# Altium PCB Audio_testboard.PcbDoc (part 1 of 6)
Units mm, origin at the board's own origin, x right, y up, seen from the top; angles counter-clockwise.
Board outline 220.73 x 144.32 mm, 4 copper layers (Top Layer, Mid-Layer 1, Mid-Layer 2, Bottom Layer), stack 1.894 mm thick; 462 components, 310 nets, 1757 pads, 740 vias.
Unrouted connection lines stored in the file: 5.
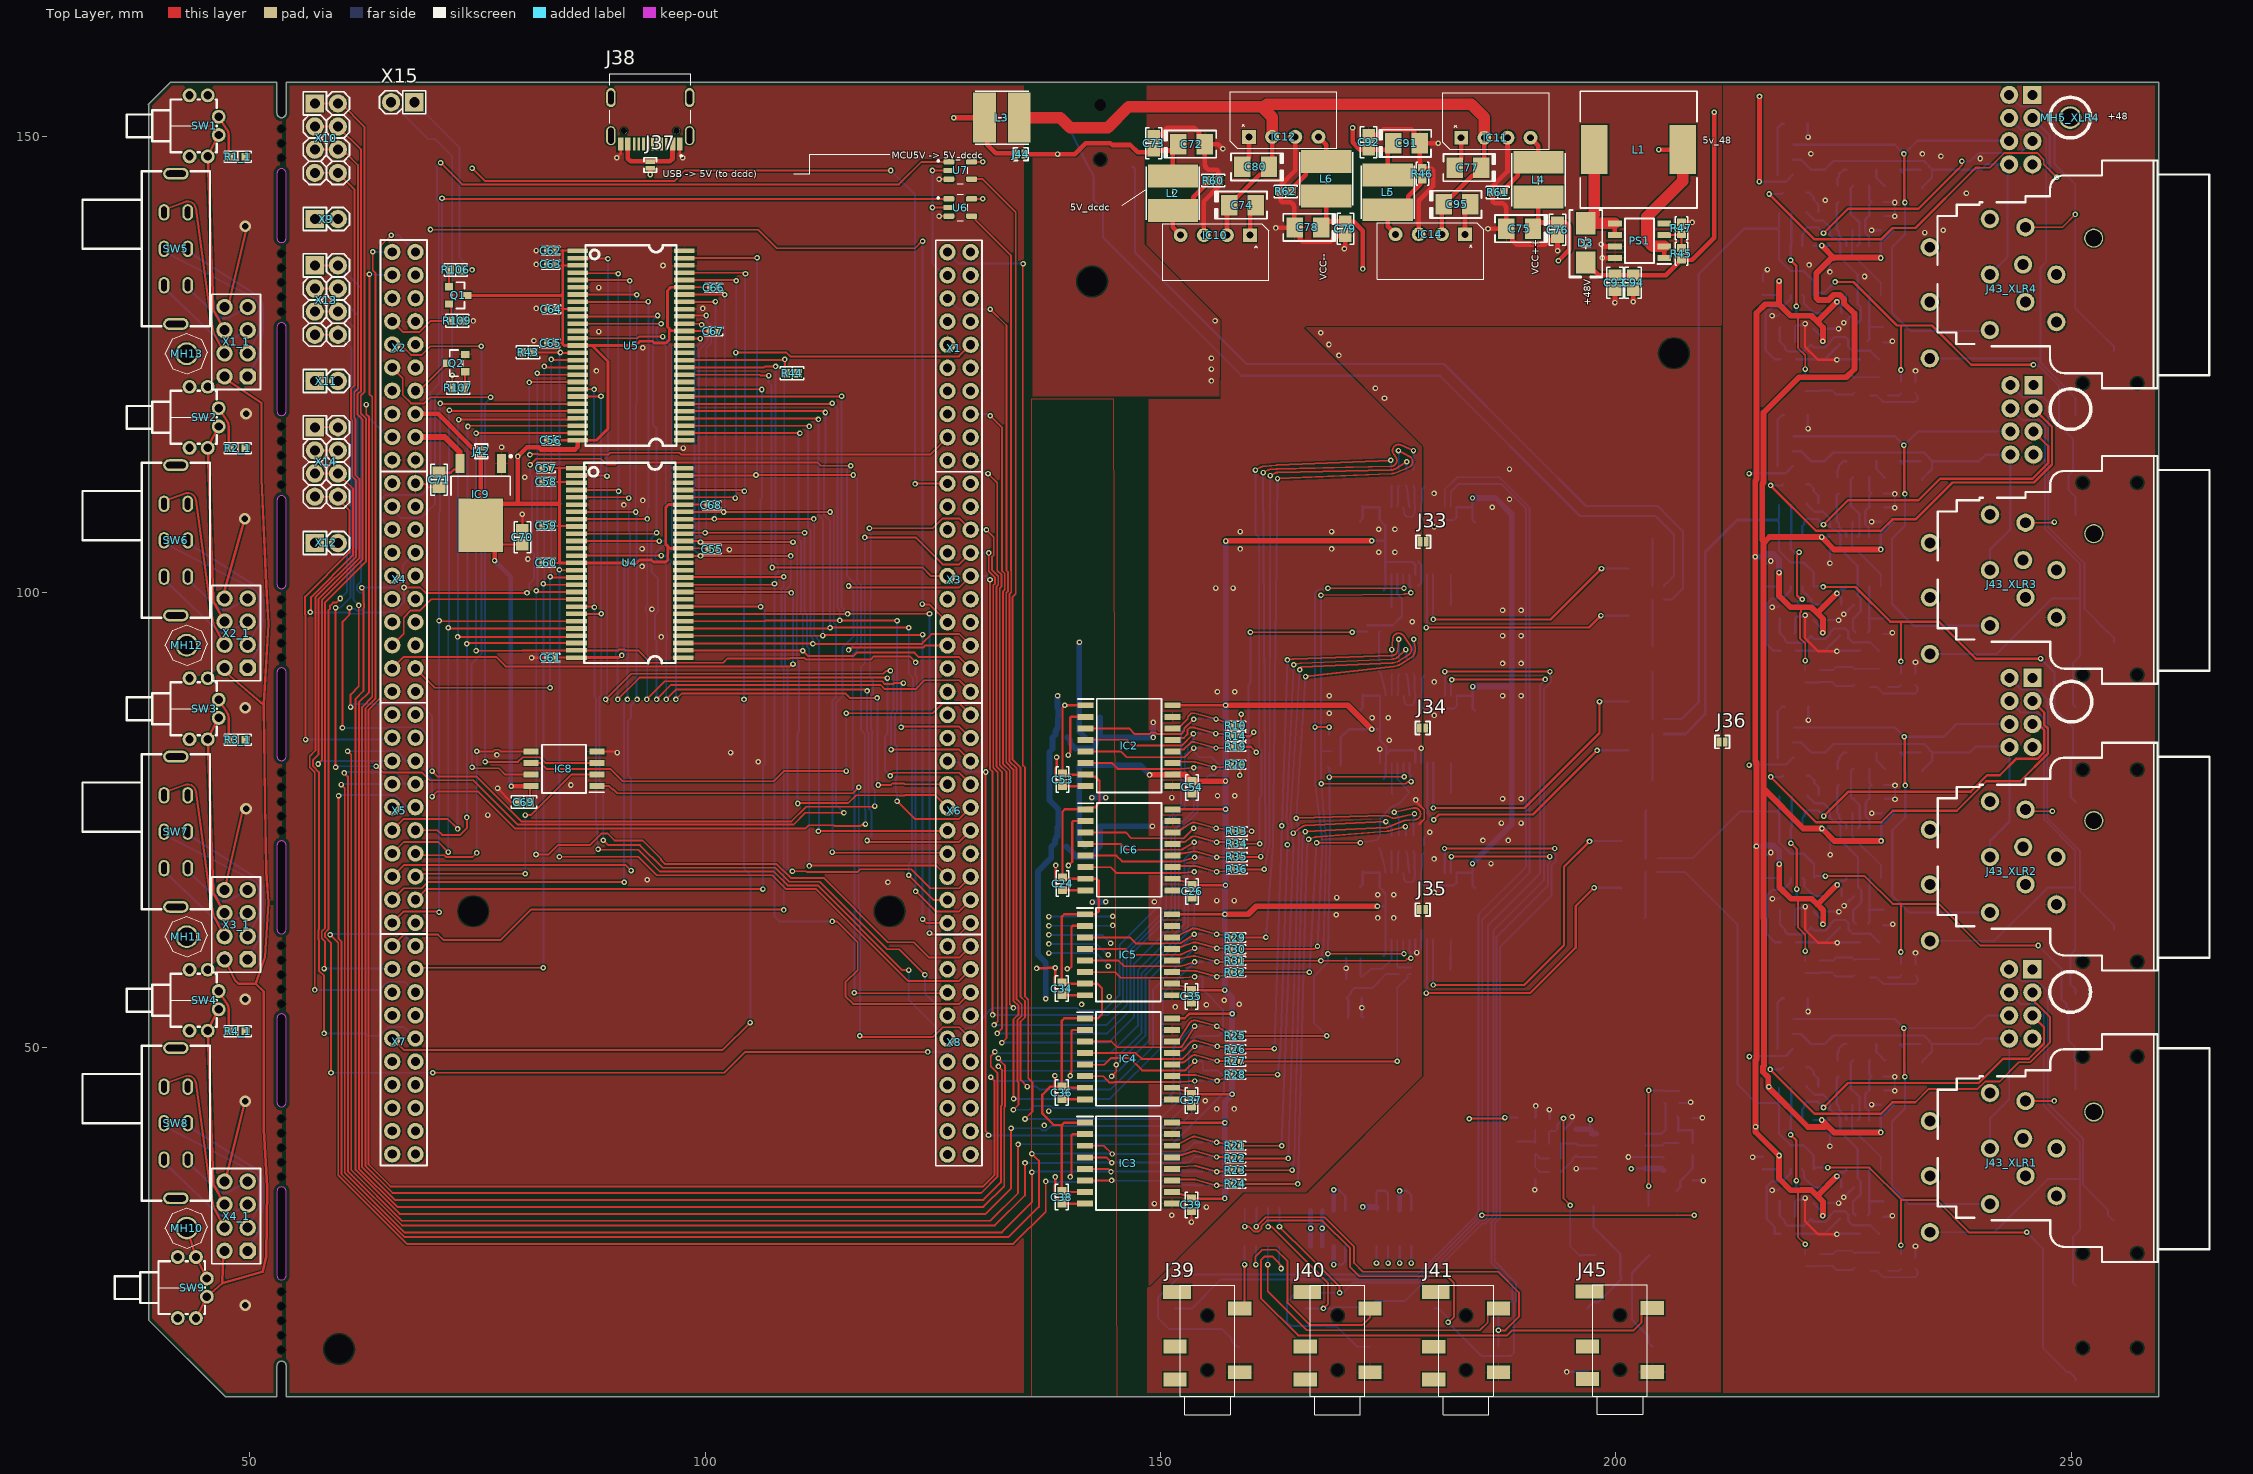
[diagram p0: Top Layer view]
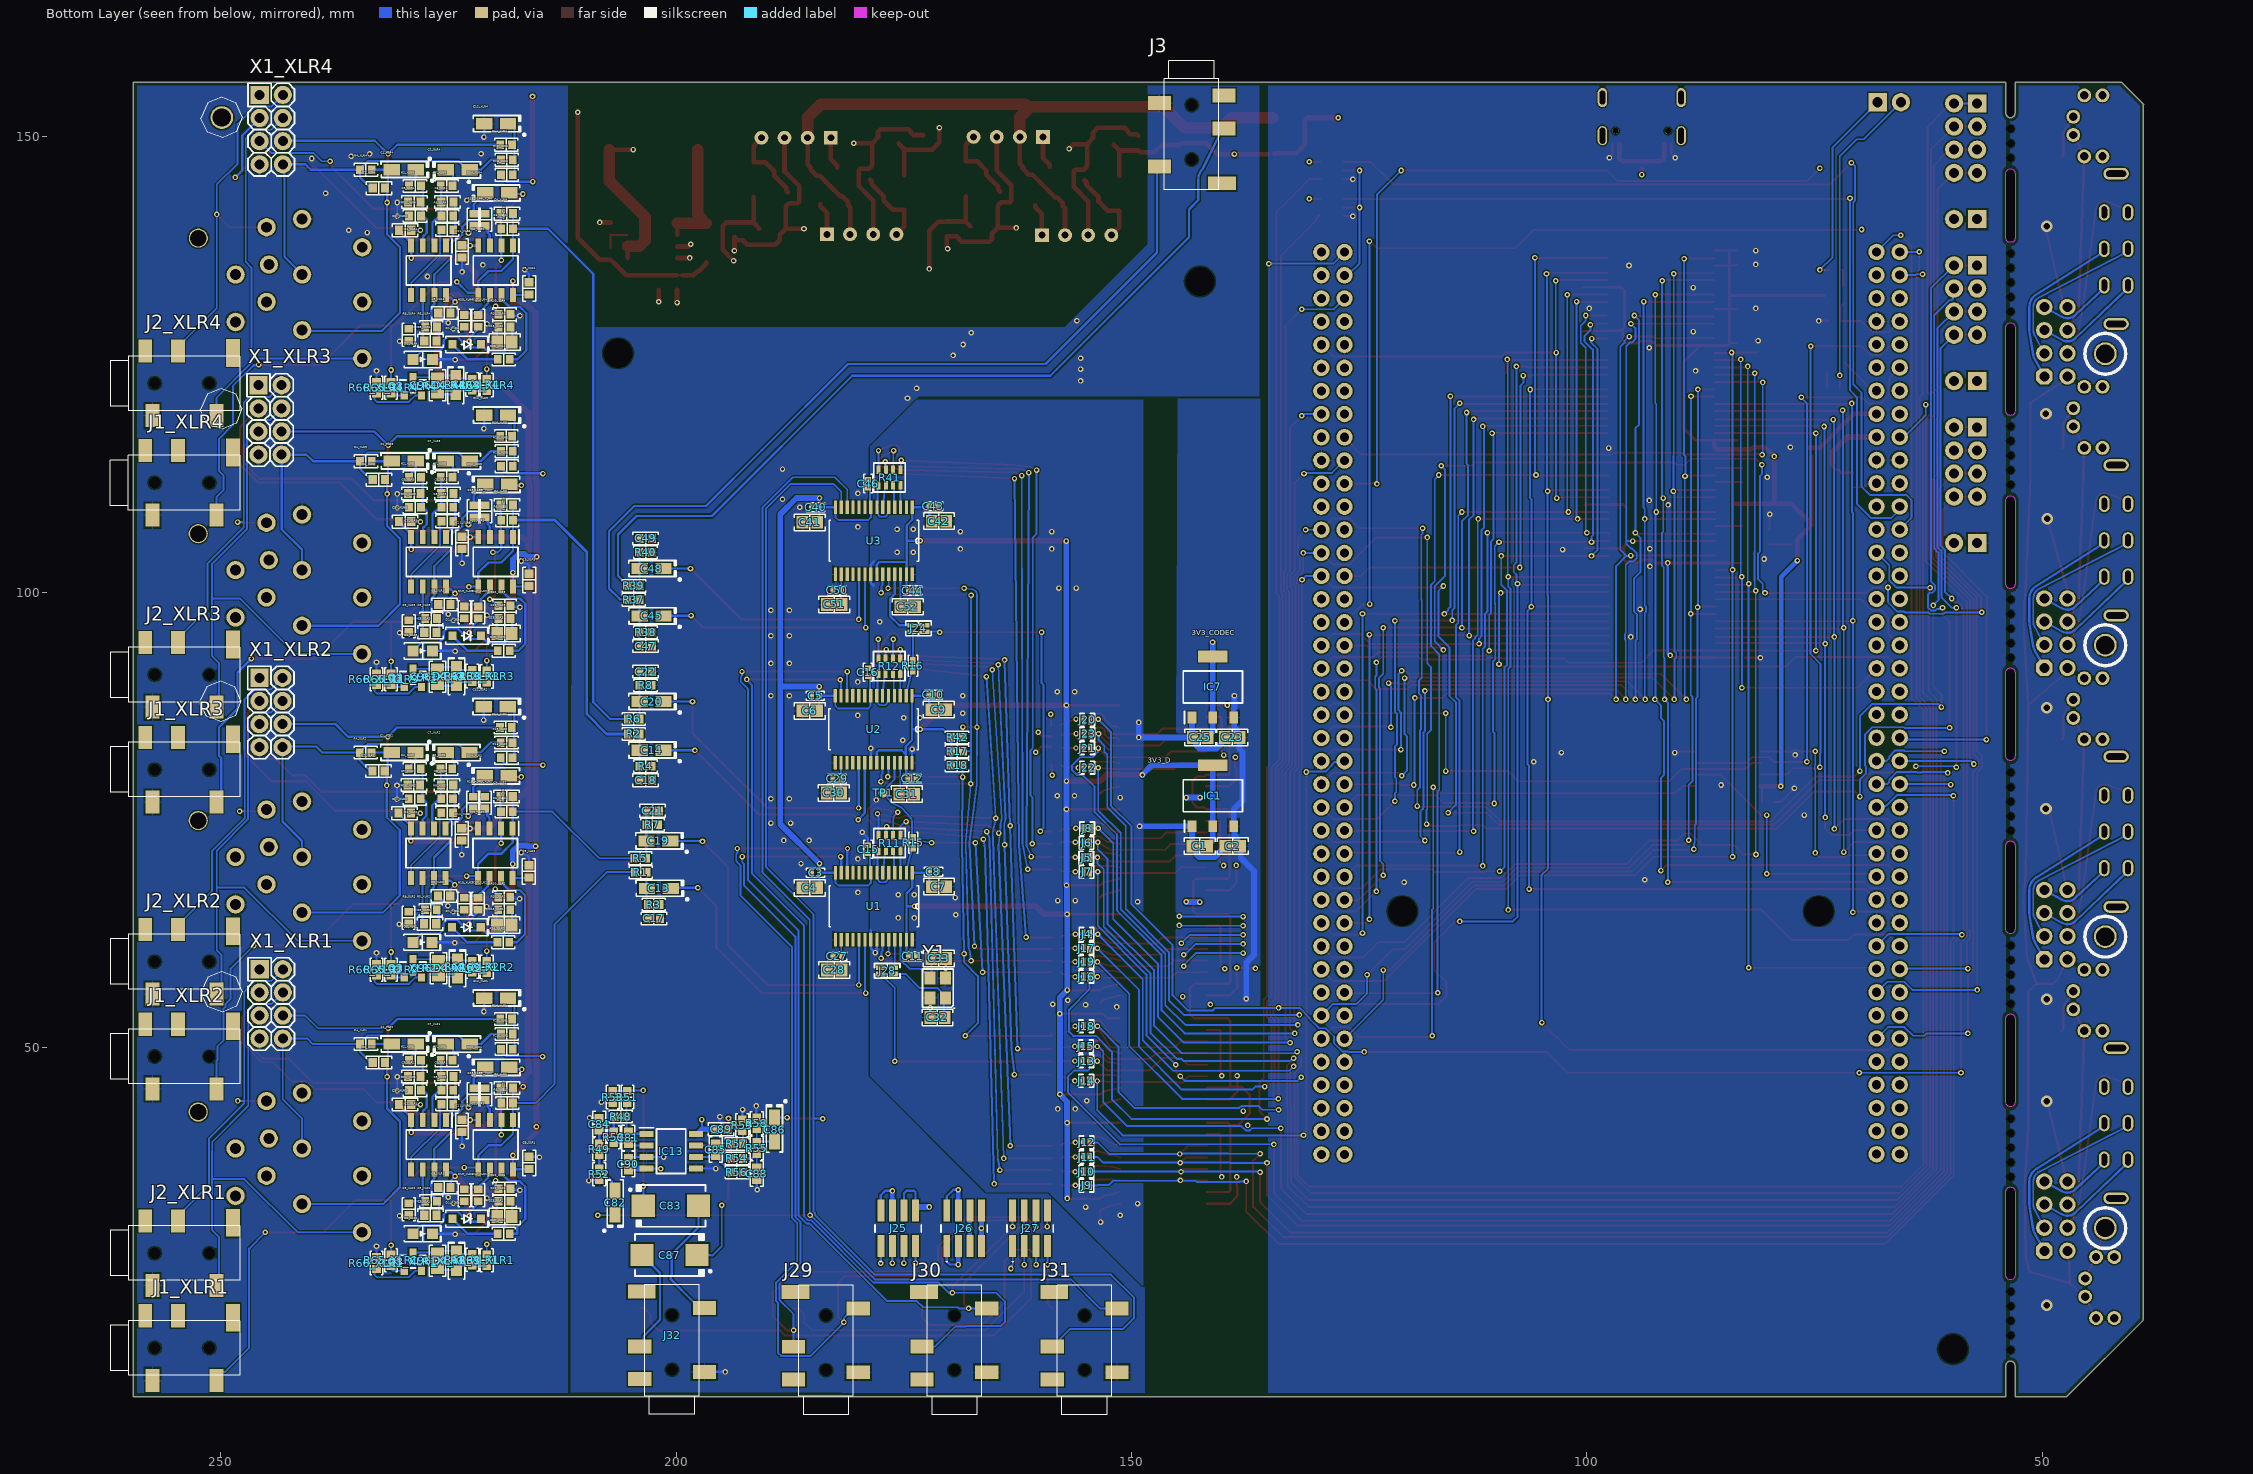
[diagram p1: Bottom Layer view, seen from below]
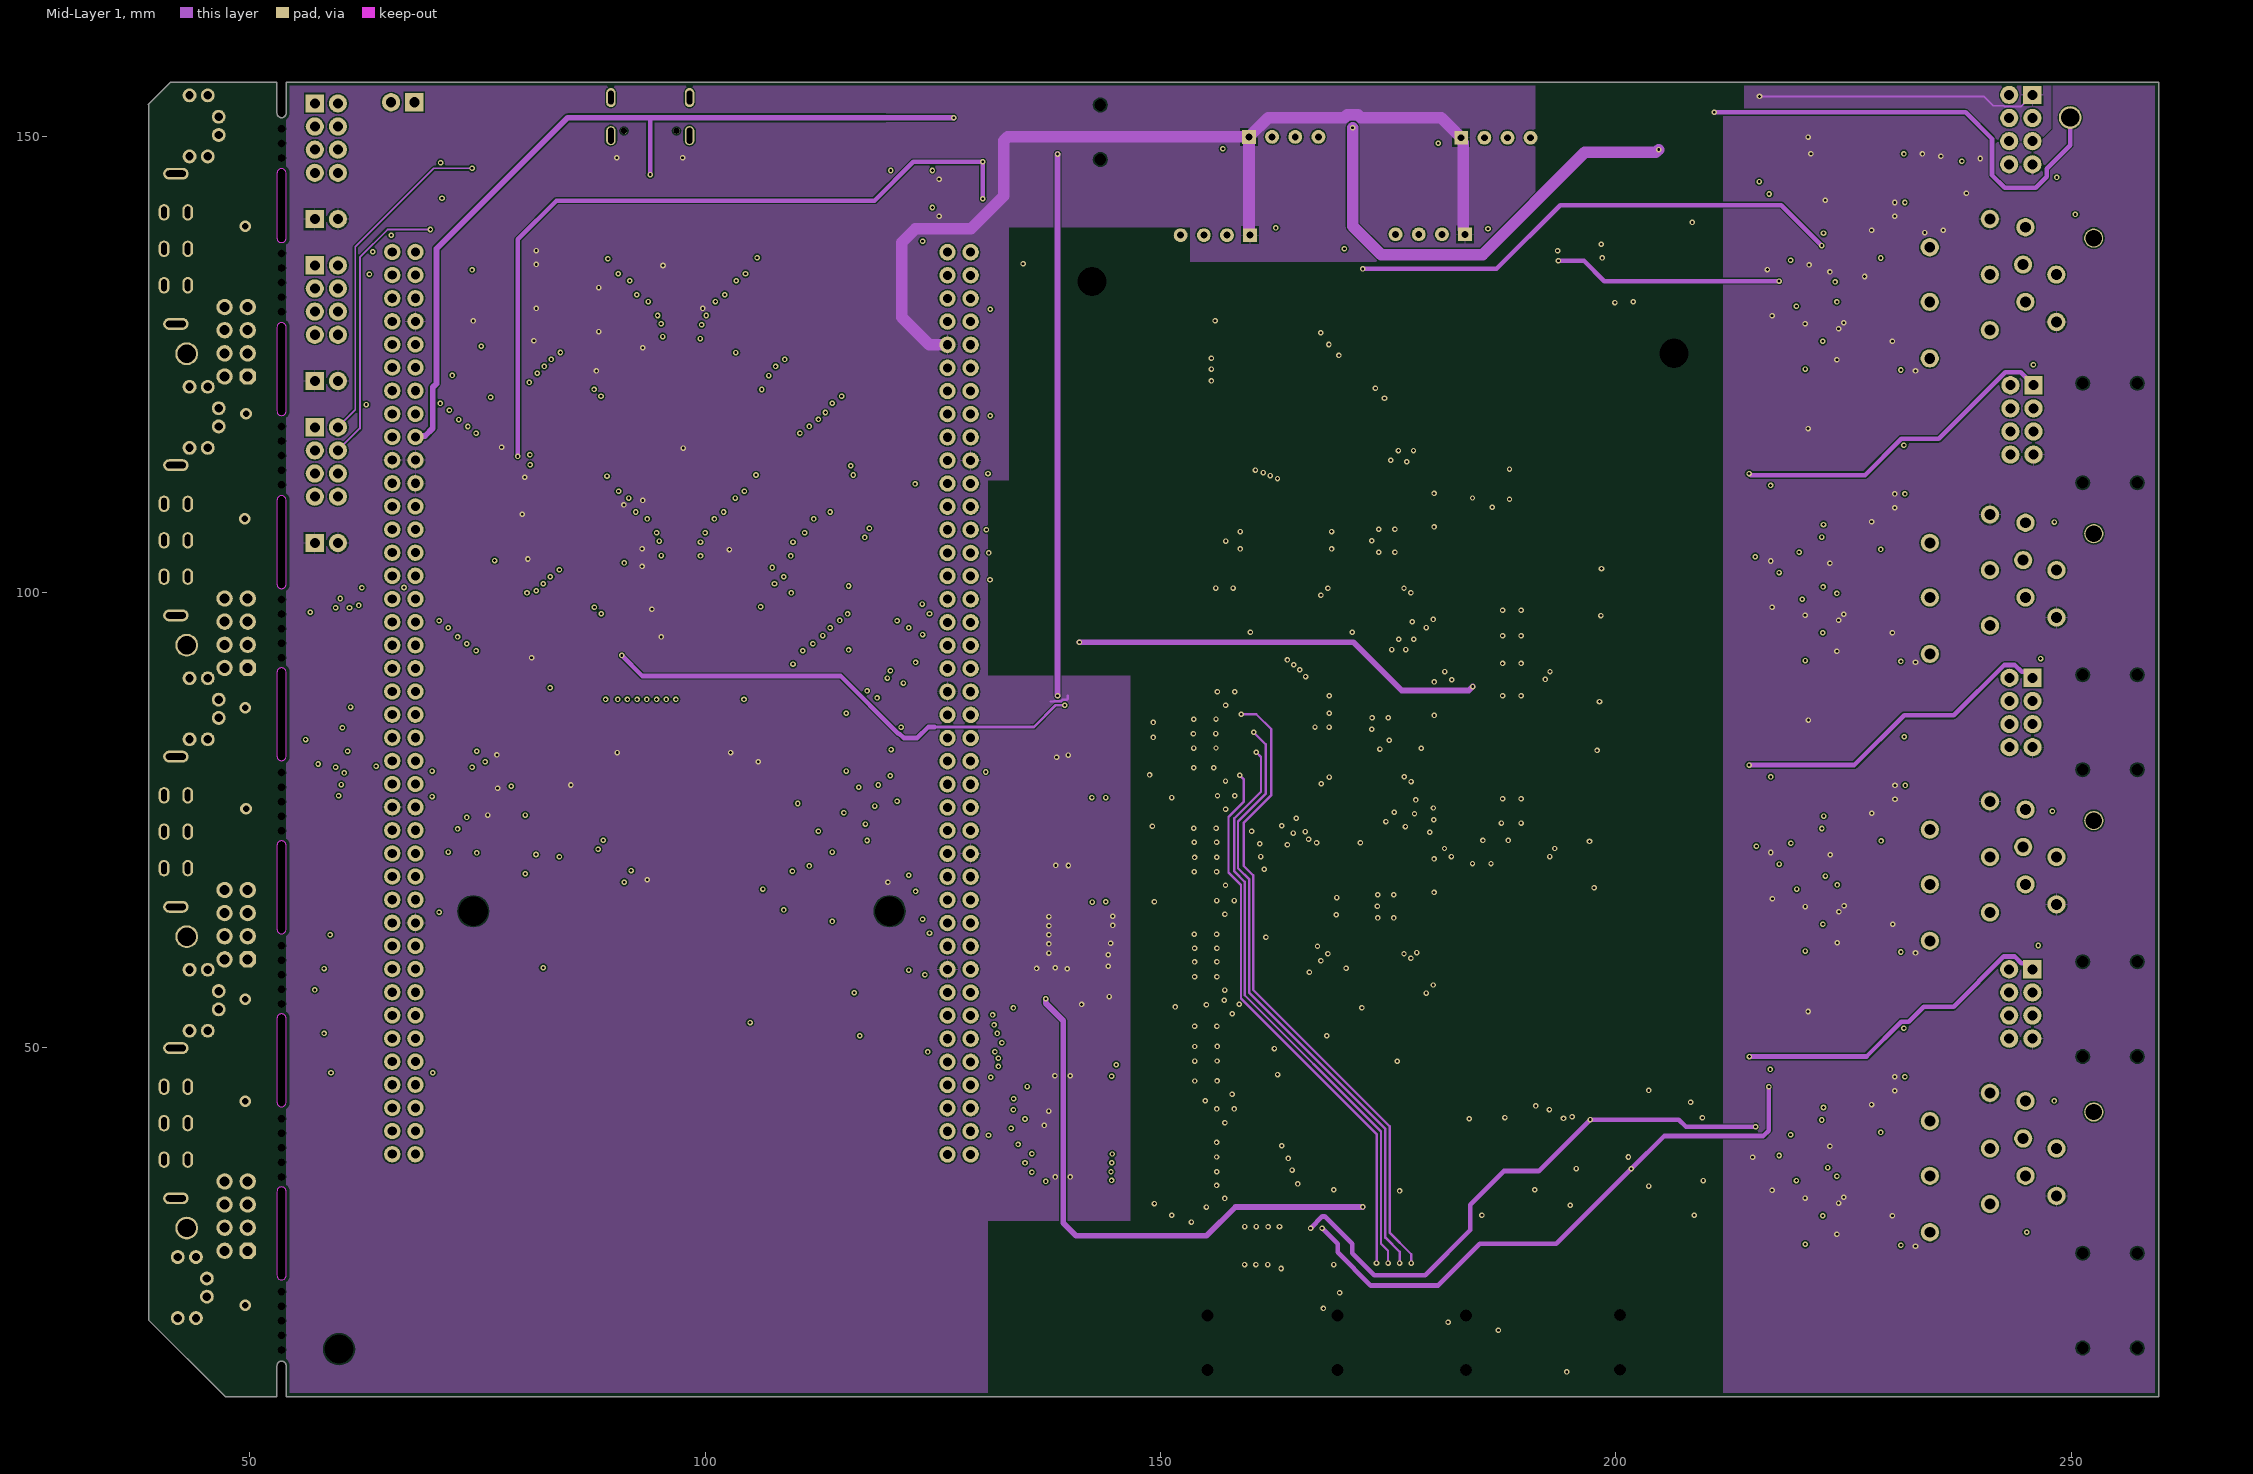
[diagram p2: Mid-Layer 1]
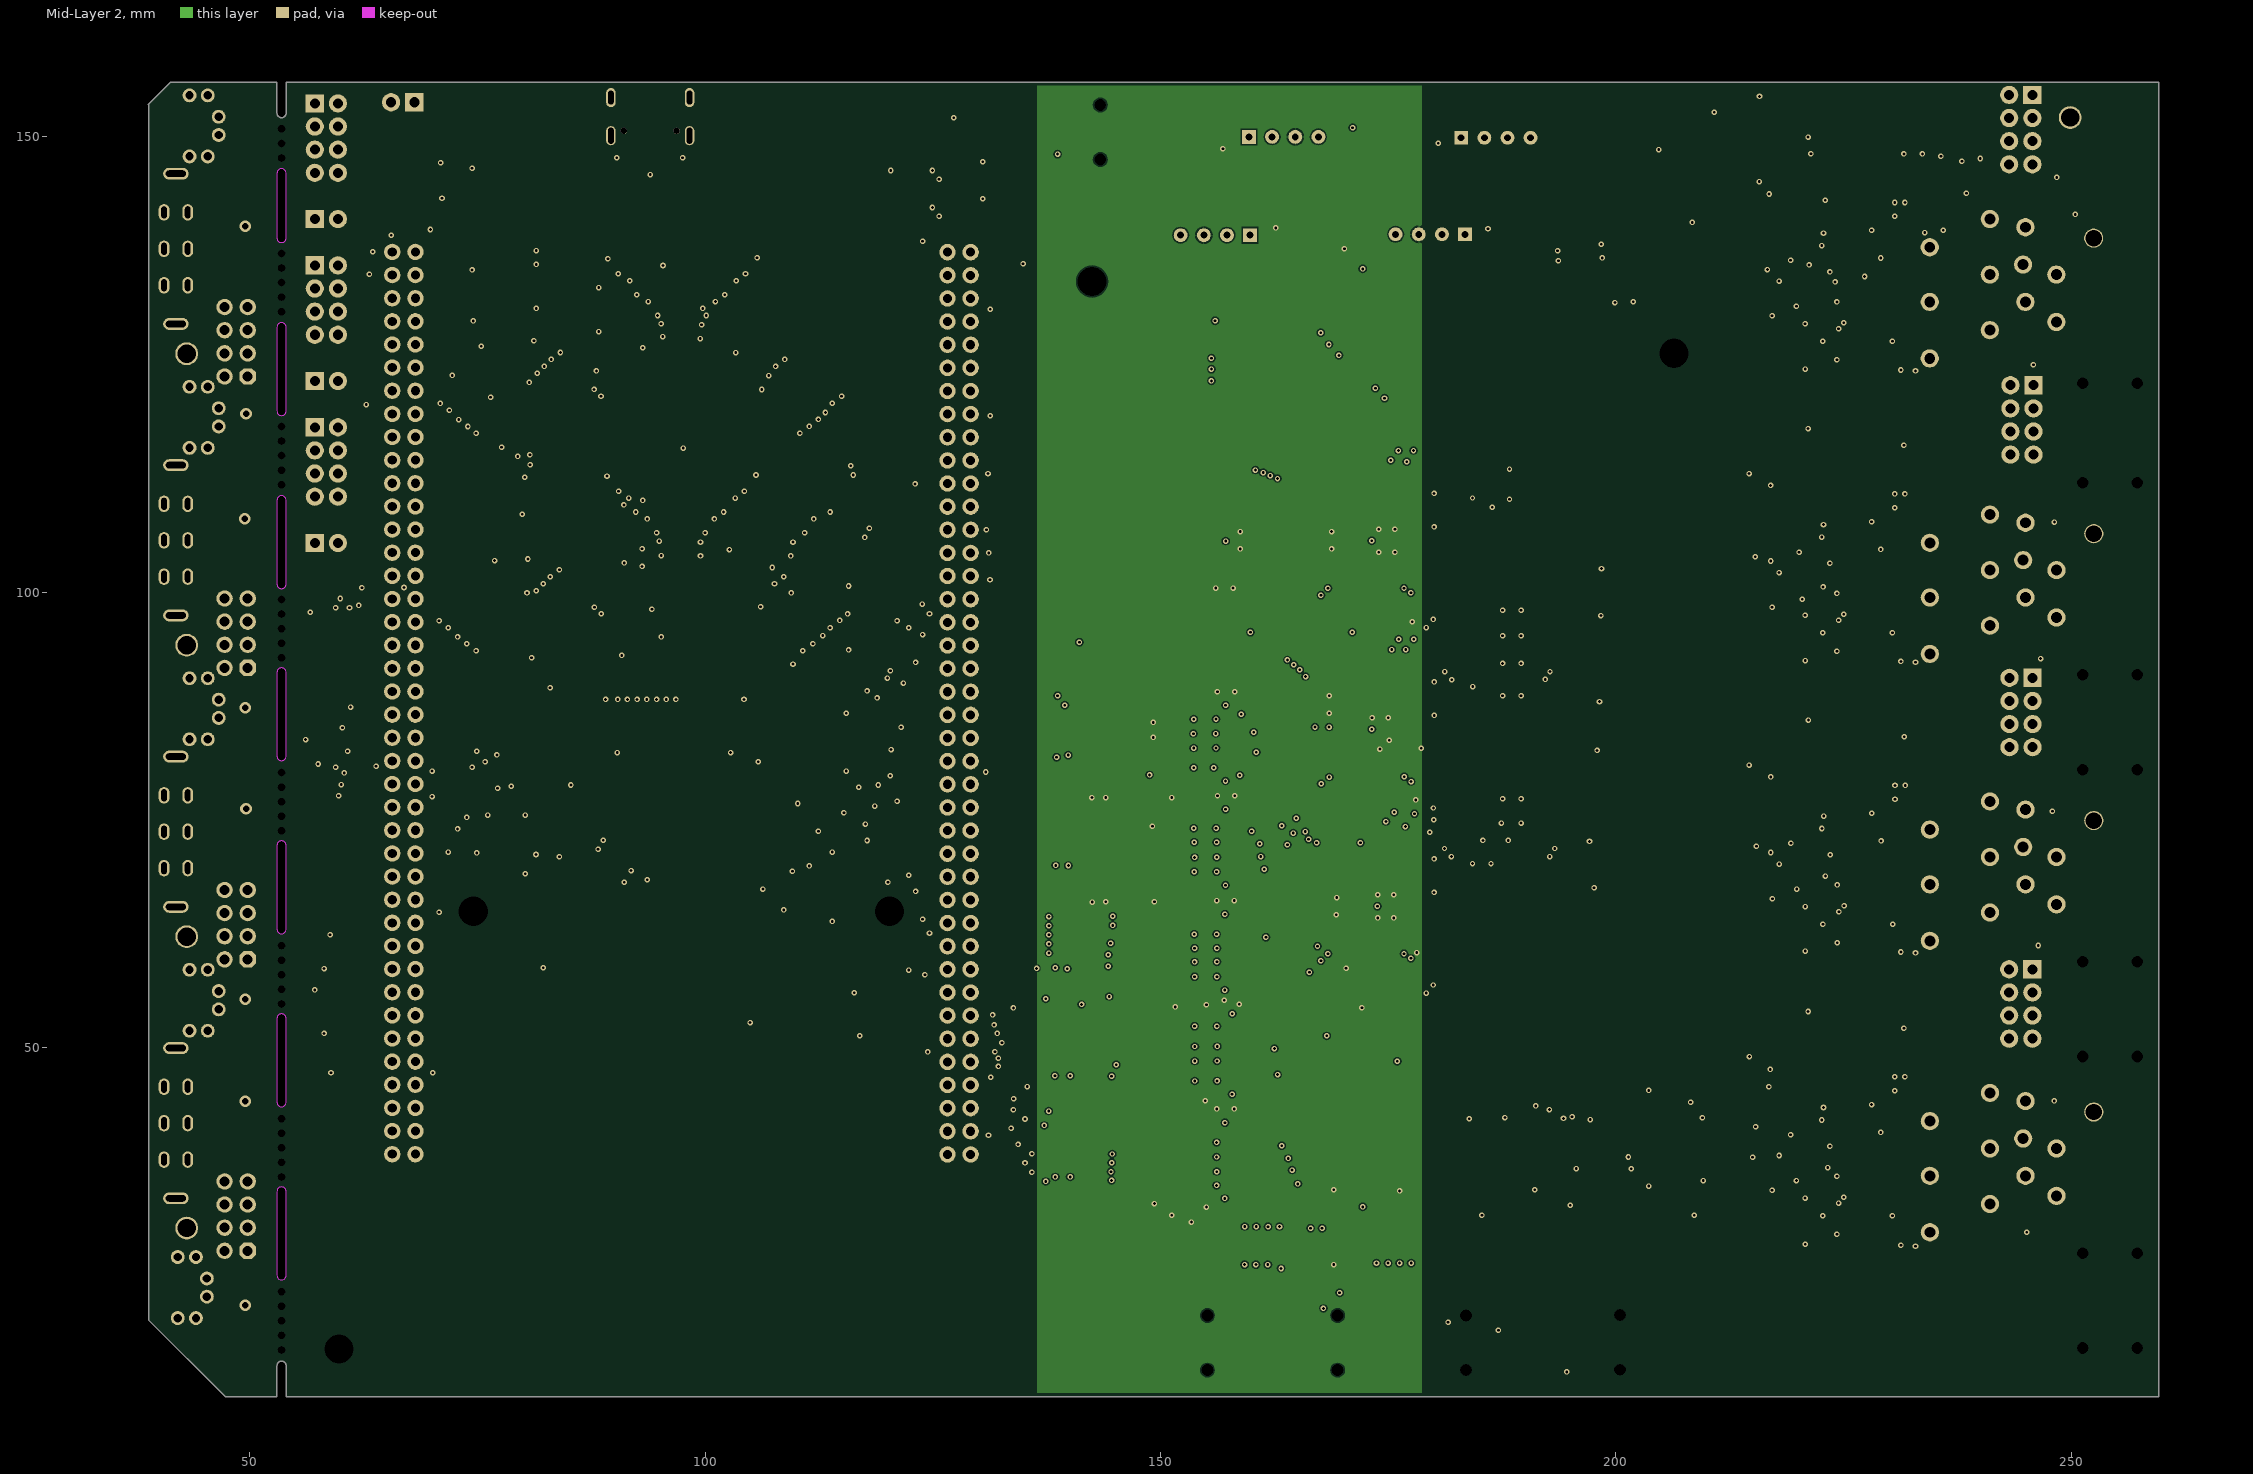
[diagram p3: Mid-Layer 2]

## Layer stack, top to bottom
Top Solder: solder mask 0.0102, Solder Resist, Dk 3.5
Top Layer: signal copper 0.0356
Dielectric 1: dielectric 1.112, FR-4, Dk 4.8
Mid-Layer 1: signal copper 0.0356
Dielectric2: dielectric 0.32, FR-4, Dk 4.8
Mid-Layer 2: signal copper 0.0356
Dielectric3: dielectric 0.32, FR-4, Dk 4.8
Bottom Layer: signal copper 0.0356
Bottom Solder: solder mask 0.0102, Solder Resist, Dk 3.5

## Board outline
53,11.684 53,15.084 cw(c53.5,15.084) 54,15.084 54,11.684 55,11.684 259.588,11.684 259.588,156 54,156 54,152.6 cw(c53.5,152.6) 53,152.6 53,156 41.321,156 41.28,155.963 38.859,153.542 38.9,153.579 38.9,20.104 47.32,11.684
cut-out: 53,25 ccw(c53.5,25) 53.5,24.5 ccw(c53.5,25) 54,25 54,34.2 ccw(c53.5,34.2) 53.5,34.7 ccw(c53.5,34.2) 53,34.2
cut-out: 53,44 ccw(c53.5,44) 53.5,43.5 ccw(c53.5,44) 54,44 54,53.2 ccw(c53.5,53.2) 53.5,53.7 ccw(c53.5,53.2) 53,53.2
cut-out: 53,63 ccw(c53.5,63) 53.5,62.5 ccw(c53.5,63) 54,63 54,72.2 ccw(c53.5,72.2) 53.5,72.7 ccw(c53.5,72.2) 53,72.2
cut-out: 53,82 ccw(c53.5,82) 53.5,81.5 ccw(c53.5,82) 54,82 54,91.2 ccw(c53.5,91.2) 53.5,91.7 ccw(c53.5,91.2) 53,91.2
cut-out: 53,100.9 ccw(c53.5,100.9) 53.5,100.4 ccw(c53.5,100.9) 54,100.9 54,110.1 ccw(c53.5,110.1) 53.5,110.6 ccw(c53.5,110.1) 53,110.1
cut-out: 53,119.9 ccw(c53.5,119.9) 53.5,119.4 ccw(c53.5,119.9) 54,119.9 54,129.1 ccw(c53.5,129.1) 53.5,129.6 ccw(c53.5,129.1) 53,129.1
cut-out: 53,138.877 ccw(c53.477,138.877) 53.477,138.4 53.523,138.4 ccw(c53.523,138.877) 54,138.877 54,146 ccw(c53.5,146) 53.5,146.5 ccw(c53.5,146) 53,146 53,145.991

## Design rules (kind name [scope] priority, off if disabled: settings)
BoardOutlineClearance [All] p1: gap=0.4 ignorepadtopadclearanceinfootprint=FALSE
Clearance [All] p1: gap=0.152 ignorepadtopadclearanceinfootprint=FALSE
ComponentClearance [All] p1: gap=-0.05 collisioncheckmode=3 verticalgap=0.1 showdistances=FALSE
DiffPairsRouting [All] p1: maxlimit=0.15 minlimit=0.125 mostfreqgap=0.125 toplayer_minwidth=0.125 toplayer_maxwidth=1.2 toplayer_prefwidth=0.125 midlayer1_minwidth=0.125 midlayer1_maxwidth=1.2 midlayer1_prefwidth=0.125 midlayer2_minwidth=0.125 midlayer2_maxwidth=1.2 midlayer2_prefwidth=0.125 bottomlayer_minwidth=0.125 bottomlayer_maxwidth=1.2 bottomlayer_prefwidth=0.125 maxuncoupledlength=12.7
Height [All] p1: minheight=0 maxheight=50 prefheight=10
HoleSize [All] p1: absolutevalues=TRUE maxlimit=5 minlimit=0.3 maxpercent=80.000 minpercent=20.000
HoleToHoleClearance [All] p1: gap=0.3 allowstackedmicrovias=TRUE
MinimumAnnularRing "For Via 2" [IsVia] p1: minimumring=0.15
MinimumAnnularRing [All] p2: minimumring=0.2
MinimumSolderMaskSliver [All] p1: minsoldermaskwidth=0.15
PlaneClearance [All] p1: clearance=0.4
PlaneConnect [All] p1: planeconnectstyle=Relief reliefexpansion=0.4 reliefentries=4 reliefconductorwidth=0.2 reliefairgap=0.2
PolygonConnect "For Via" [All vs IsVia] p1: connectstyle=Direct reliefconductorwidth=0.2 reliefentries=4 polygonreliefangle="90 Angle" airgapwidth=0.2
PolygonConnect [All] p2: connectstyle=Relief reliefconductorwidth=0.15 reliefentries=4 polygonreliefangle="90 Angle" airgapwidth=0.2
RoutingVias [All] p1: holewidth=0.305 width=0.61 viastyle="Through Hole" minholewidth=0.305 minwidth=0.61 maxholewidth=2 maxwidth=3
SilkToSilkClearance [All] p1: silktosilkclearance=0.05
SilkToSolderMaskClearance [IsPad] p1: minsilkscreentomaskgap=0.05 clearancetoexposedcopper=FALSE
SolderMaskExpansion [All] p1: expansion=0.05 istentingtop=FALSE
Width [All] p1: maxlimit=5 minlimit=0.203 preferedwidth=0.203
20 further rules are at their usual default settings.

## Classes and differential pairs
channel class XLR: XLR1 XLR2 XLR3 XLR4
net class D[0..15]: D0 D1 D2 D3 D4 D5 D6 D7 D8 D9 D10 D11 D12 D13 D14 D15
net class A[0..11]: A0 A1 A2 A3 A4 A5 A6 A7 A8 A9 A10 A11
component class XLR4: C1_XLR4 C2_XLR4 C3_XLR4 C4_XLR4 C5_XLR4 C6_XLR4 C7_XLR4 C8_XLR4 C9_XLR4 C10_XLR4 C11_XLR4 C12_XLR4 C13_XLR4 C14_XLR4 C96_XLR4 D1_XLR4 D2_XLR4 D4_XLR4 IC1_XLR4 IC2_XLR4 J1_XLR4 J2_XLR4 J43_XLR4 MH5_XLR4 Q3_XLR4 R1_XLR4 R2_XLR4 R3_XLR4 R4_XLR4 R5_XLR4 R6_XLR4 R7_XLR4 R8_XLR4 R9_XLR4 R10_XLR4 R11_XLR4 R13_XLR4 R14_XLR4 R15_XLR4 R16_XLR4 R17_XLR4 R18_XLR4 R19_XLR4 R20_XLR4 R63_XLR4 R64_XLR4 R65_XLR4 R66_XLR4 X1_XLR4
component class XLR3: C1_XLR3 C2_XLR3 C3_XLR3 C4_XLR3 C5_XLR3 C6_XLR3 C7_XLR3 C8_XLR3 C9_XLR3 C10_XLR3 C11_XLR3 C12_XLR3 C13_XLR3 C14_XLR3 C96_XLR3 D1_XLR3 D2_XLR3 D4_XLR3 IC1_XLR3 IC2_XLR3 J1_XLR3 J2_XLR3 J43_XLR3 Q3_XLR3 R1_XLR3 R2_XLR3 R3_XLR3 R4_XLR3 R5_XLR3 R6_XLR3 R7_XLR3 R8_XLR3 R9_XLR3 R10_XLR3 R11_XLR3 R13_XLR3 R14_XLR3 R15_XLR3 R16_XLR3 R17_XLR3 R18_XLR3 R19_XLR3 R20_XLR3 R63_XLR3 R64_XLR3 R65_XLR3 R66_XLR3 X1_XLR3
component class XLR2: C1_XLR2 C2_XLR2 C3_XLR2 C4_XLR2 C5_XLR2 C6_XLR2 C7_XLR2 C8_XLR2 C9_XLR2 C10_XLR2 C11_XLR2 C12_XLR2 C13_XLR2 C14_XLR2 C96_XLR2 D1_XLR2 D2_XLR2 D4_XLR2 IC1_XLR2 IC2_XLR2 J1_XLR2 J2_XLR2 J43_XLR2 Q3_XLR2 R1_XLR2 R2_XLR2 R3_XLR2 R4_XLR2 R5_XLR2 R6_XLR2 R7_XLR2 R8_XLR2 R9_XLR2 R10_XLR2 R11_XLR2 R13_XLR2 R14_XLR2 R15_XLR2 R16_XLR2 R17_XLR2 R18_XLR2 R19_XLR2 R20_XLR2 R63_XLR2 R64_XLR2 R65_XLR2 R66_XLR2 X1_XLR2
component class XLR1: C1_XLR1 C2_XLR1 C3_XLR1 C4_XLR1 C5_XLR1 C6_XLR1 C7_XLR1 C8_XLR1 C9_XLR1 C10_XLR1 C11_XLR1 C12_XLR1 C13_XLR1 C14_XLR1 C96_XLR1 D1_XLR1 D2_XLR1 D4_XLR1 IC1_XLR1 IC2_XLR1 J1_XLR1 J2_XLR1 J43_XLR1 Q3_XLR1 R1_XLR1 R2_XLR1 R3_XLR1 R4_XLR1 R5_XLR1 R6_XLR1 R7_XLR1 R8_XLR1 R9_XLR1 R10_XLR1 R11_XLR1 R13_XLR1 R14_XLR1 R15_XLR1 R16_XLR1 R17_XLR1 R18_XLR1 R19_XLR1 R20_XLR1 R63_XLR1 R64_XLR1 R65_XLR1 R66_XLR1 X1_XLR1
component class Audio_testboard: C1 C2 C3 C4 C5 C6 C7 C8 C9 C10 C11 C12 C13 C14 C15 C16 C17 C18 C19 C20 C21 C22 C23 C24 C25 C26 C27 C28 C29 C30 C31 C32 C33 C34 C35 C36 C37 C38 C39 C40 C41 C42 C43 C44 C45 C46 C47 C48 C49 C50 C51 C52 C53 C54 C55 C56 C57 C58 C59 C60 C61 C62 C63 C64 C65 C66 C67 C68 C69 C70 C71 C72 C73 C74 C75 C76 C77 C78 C79 C80 C81 C82 C83 C84 C85 C86 C87 C88 C89 C90 C91 C92 C93 C94 C95 D3 IC1 IC2 IC3 IC4 IC5 IC6 IC7 IC8 IC9 IC10 IC11 IC12 IC13 IC14 J3 J4 J5 J6 J7 J8 J9 J10 J11 J12 J13 J14 J15 J16 J17 J18 J19 J20 J21 J22 J23 J24 J25 J26 J27 J28 J29 J30 J31 J32 J33 J34 J35 J36 J37 J38 J39 J40 J41 J42 J44 J45 L1 L2 L3 L4 L5 L6 PS1 Q1 Q2 R1 R2 R3 R4 R5 R6 R7 R8 R10 R11 R12 R14 R15 R16 R17 R18 R19 R20 R21 R22 R23 R24 R25 R26 R27 R28 R29 R30 R31 R32 R33 R34 R35 R36 R37 R38 R39 R40 R41 R42 R43 R44 R45 R46 R47 R48 R49 R50 R51 R52 R53 R54 R55 R56 R57 R58 R59 R60 R61 R62 R106 R107 R109 TP1 U1 U2 U3 U4 U5 U6 U7 U? X1 X2 X3 X4 X5 X6 X7 X8 X9 X10 X11 X12 X13 X14 X15 Y1

## Components (designator, comment, footprint, x,y, rotation, side; value= is the part's Value field where it differs from the comment)
C1 "10 µF" "CAP 0805_2012" 142.515,72.117 r180 bottom
C1_XLR1 "10 µF" "CAP POL 1206_3216" 229.894,50.393 r0 bottom (schematic designator C1)
C1_XLR2 "10 µF" "CAP POL 1206_3216" 229.926,82.393 r0 bottom (schematic designator C1)
C1_XLR3 "10 µF" "CAP POL 1206_3216" 229.894,114.393 r0 bottom (schematic designator C1)
C1_XLR4 "10 µF" "CAP POL 1206_3216" 229.894,146.393 r0 bottom (schematic designator C1)
C2 "1 µF" "CAP 0805_2012" 138.883,72.117 r180 bottom
C2_XLR1 "10000 pF" "CAP 0603_1608" 232.632,48.361 r180 bottom (schematic designator C2)
C2_XLR2 "10000 pF" "CAP 0603_1608" 232.664,80.361 r180 bottom (schematic designator C2)
C2_XLR3 "10000 pF" "CAP 0603_1608" 232.632,112.361 r180 bottom (schematic designator C2)
C2_XLR4 "10000 pF" "CAP 0603_1608" 232.632,144.361 r180 bottom (schematic designator C2)
C3 "0.1 µF" "CAP 0402_1005" 184.7,69.196 r180 bottom
C3_XLR1 "22 pF" "CAP 0603_1608" 226.973,31.597 r0 bottom (schematic designator C3)
C3_XLR2 "22 pF" "CAP 0603_1608" 227.005,63.597 r0 bottom (schematic designator C3)
C3_XLR3 "22 pF" "CAP 0603_1608" 226.973,95.597 r0 bottom (schematic designator C3)
C3_XLR4 "22 pF" "CAP 0603_1608" 226.973,127.597 r0 bottom (schematic designator C3)
C4 "10 µF" "CAP 0805_2012" 185.314,67.545 r180 bottom
C4_XLR1 "22 pF" "CAP 0603_1608" 218.591,45.567 r0 bottom (schematic designator C4)
C4_XLR2 "22 pF" "CAP 0603_1608" 218.623,77.567 r0 bottom (schematic designator C4)
C4_XLR3 "22 pF" "CAP 0603_1608" 218.591,109.567 r0 bottom (schematic designator C4)
C4_XLR4 "22 pF" "CAP 0603_1608" 218.591,141.567 r0 bottom (schematic designator C4)
C5 "0.1 µF" "CAP 0402_1005" 184.725,88.627 r180 bottom
C5_XLR1 "22 pF" "CAP 0603_1608" 228.751,46.837 r180 bottom (schematic designator C5)
C5_XLR2 "22 pF" "CAP 0603_1608" 228.783,78.837 r180 bottom (schematic designator C5)
C5_XLR3 "22 pF" "CAP 0603_1608" 228.751,110.837 r180 bottom (schematic designator C5)
C5_XLR4 "22 pF" "CAP 0603_1608" 228.751,142.837 r180 bottom (schematic designator C5)
C6 "10 µF" "CAP 0805_2012" 185.339,86.976 r180 bottom
C6_XLR1 "22 pF" "CAP 0603_1608" 225.115,46.837 r0 bottom (schematic designator C6)
C6_XLR2 "22 pF" "CAP 0603_1608" 225.147,78.837 r0 bottom (schematic designator C6)
C6_XLR3 "22 pF" "CAP 0603_1608" 225.115,110.837 r0 bottom (schematic designator C6)
C6_XLR4 "22 pF" "CAP 0603_1608" 225.115,142.837 r0 bottom (schematic designator C6)
C7 "10 µF" "CAP 0805_2012" 171.141,67.672 r0 bottom
C7_XLR1 "10 µF" "CAP POL 1206_3216" 223.972,50.393 r180 bottom (schematic designator C7)
C7_XLR2 "10 µF" "CAP POL 1206_3216" 224.004,82.393 r180 bottom (schematic designator C7)
C7_XLR3 "10 µF" "CAP POL 1206_3216" 223.972,114.393 r180 bottom (schematic designator C7)
C7_XLR4 "10 µF" "CAP POL 1206_3216" 223.972,146.393 r180 bottom (schematic designator C7)
C8 "0.1 µF" "CAP 0402_1005" 171.755,69.323 r0 bottom
C8_XLR1 "0.1 µF" "CAP 0603_1608" 225.449,34.645 r0 bottom (schematic designator C8)
C8_XLR2 "0.1 µF" "CAP 0603_1608" 225.481,66.645 r0 bottom (schematic designator C8)
C8_XLR3 "0.1 µF" "CAP 0603_1608" 225.449,98.645 r0 bottom (schematic designator C8)
C8_XLR4 "0.1 µF" "CAP 0603_1608" 225.449,130.645 r0 bottom (schematic designator C8)
C9 "10 µF" "CAP 0805_2012" 171.166,87.103 r0 bottom
C9_XLR1 "0.1 µF" "CAP 0603_1608" 216.138,37.352 r90 bottom (schematic designator C9)
C9_XLR2 "0.1 µF" "CAP 0603_1608" 216.17,69.352 r90 bottom (schematic designator C9)
C9_XLR3 "0.1 µF" "CAP 0603_1608" 216.138,101.352 r90 bottom (schematic designator C9)
C9_XLR4 "0.1 µF" "CAP 0603_1608" 216.138,133.352 r90 bottom (schematic designator C9)
C10 "0.1 µF" "CAP 0402_1005" 171.78,88.754 r0 bottom
C10_XLR1 "0.1 µF" "CAP 0603_1608" 229.767,43.744 r0 bottom (schematic designator C10)
C10_XLR2 "0.1 µF" "CAP 0603_1608" 229.799,75.744 r0 bottom (schematic designator C10)
C10_XLR3 "0.1 µF" "CAP 0603_1608" 229.767,107.744 r0 bottom (schematic designator C10)
C10_XLR4 "0.1 µF" "CAP 0603_1608" 229.767,139.744 r0 bottom (schematic designator C10)
C11 "0.1 µF" "CAP 0402_1005" 174.041,60.052 r180 bottom
C11_XLR1 "0.1 µF" "CAP 0603_1608" 223.504,41.416 r90 bottom (schematic designator C11)
C11_XLR2 "0.1 µF" "CAP 0603_1608" 223.536,73.416 r90 bottom (schematic designator C11)
C11_XLR3 "0.1 µF" "CAP 0603_1608" 223.504,105.416 r90 bottom (schematic designator C11)
C11_XLR4 "0.1 µF" "CAP 0603_1608" 223.504,137.416 r90 bottom (schematic designator C11)
C12 "0.1 µF" "CAP 0402_1005" 174.066,79.503 r180 bottom
C12_XLR1 "10 µF" "CAP POL 1206_3216" 219.772,55.428 r0 bottom (schematic designator C12)
C12_XLR2 "10 µF" "CAP POL 1206_3216" 219.804,87.428 r0 bottom (schematic designator C12)
C12_XLR3 "10 µF" "CAP POL 1206_3216" 219.772,119.428 r0 bottom (schematic designator C12)
C12_XLR4 "10 µF" "CAP POL 1206_3216" 219.772,151.428 r0 bottom (schematic designator C12)
C13 "10 µF" "CAP POL 1206_3216" 201.895,67.486 r0 bottom
C13_XLR1 "1 µF" "CAP 0805_2012" 218.843,31.47 r180 bottom (schematic designator C13)
C13_XLR2 "1 µF" "CAP 0805_2012" 218.875,63.47 r180 bottom (schematic designator C13)
C13_XLR3 "1 µF" "CAP 0805_2012" 218.843,95.47 r180 bottom (schematic designator C13)
C13_XLR4 "1 µF" "CAP 0805_2012" 218.843,127.47 r180 bottom (schematic designator C13)
C14 "10 µF" "CAP POL 1206_3216" 202.704,82.66 r0 bottom
C14_XLR1 "10 µF" "CAP POL 1206_3216" 219.654,47.853 r180 bottom (schematic designator C14)
C14_XLR2 "10 µF" "CAP POL 1206_3216" 219.686,79.853 r180 bottom (schematic designator C14)
C14_XLR3 "10 µF" "CAP POL 1206_3216" 219.654,111.853 r180 bottom (schematic designator C14)
C14_XLR4 "10 µF" "CAP POL 1206_3216" 219.654,143.853 r180 bottom (schematic designator C14)
C15 "0.1 µF" "CAP 0402_1005" 178.926,71.795 r270 bottom
C16 "0.1 µF" "CAP 0402_1005" 178.951,91.226 r270 bottom
C17 "220 pF" "CAP 0603_1608" 202.45,64.184 r0 bottom
C18 "220 pF" "CAP 0603_1608" 203.339,79.358 r0 bottom
C19 "10 µF" "CAP POL 1206_3216" 201.942,72.693 r0 bottom
C20 "10 µF" "CAP POL 1206_3216" 202.704,87.994 r0 bottom
C21 "220 pF" "CAP 0603_1608" 202.577,75.995 r0 bottom
C22 "220 pF" "CAP 0603_1608" 203.339,91.296 r0 bottom
C23 "1 µF" "CAP 0805_2012" 138.959,84.055 r180 bottom
C24 "0.1µF" "CAP 0603_1608" 139.246,67.994 r90 top
C25 "10 µF" "CAP 0805_2012" 142.477,84.055 r180 bottom
C26 "0.1µF" "CAP 0603_1608" 153.47,67.145 r90 top
C27 "0.1 µF" "CAP 0402_1005" 182.287,60.052 r0 bottom
C28 "10 µF" "CAP 0805_2012" 182.647,58.528 r0 bottom
C29 "0.1 µF" "CAP 0402_1005" 182.338,79.508 r0 bottom
C30 "10 µF" "CAP 0805_2012" 182.672,77.959 r0 bottom
C31 "9 pF" "CAP 0805_2012" 174.697,77.832 r180 bottom
C32 "9 pF" "CAP 0805_2012" 171.306,53.321 r0 bottom
C33 "9 pF" "CAP 0805_2012" 171.179,59.798 r180 bottom
C34 "0.1µF" "CAP 0603_1608" 139.175,56.476 r90 top
C35 "0.1µF" "CAP 0603_1608" 153.399,55.627 r90 top
C36 "0.1µF" "CAP 0603_1608" 139.175,45.046 r90 top
C37 "0.1µF" "CAP 0603_1608" 153.399,44.197 r90 top
C38 "0.1µF" "CAP 0603_1608" 139.175,33.596 r90 top
C39 "0.1µF" "CAP 0603_1608" 153.399,32.747 r90 top
C40 "0.1 µF" "CAP 0402_1005" 184.7,109.328 r180 bottom
C41 "10 µF" "CAP 0805_2012" 185.314,107.677 r180 bottom
C42 "10 µF" "CAP 0805_2012" 171.141,107.804 r0 bottom
C43 "0.1 µF" "CAP 0402_1005" 171.755,109.455 r0 bottom
C44 "0.1 µF" "CAP 0402_1005" 174.041,100.184 r180 bottom
C45 "10 µF" "CAP POL 1206_3216" 202.704,97.392 r0 bottom
C46 "0.1 µF" "CAP 0402_1005" 178.926,111.927 r270 bottom
C47 "220 pF" "CAP 0603_1608" 203.339,94.09 r0 bottom
C48 "10 µF" "CAP POL 1206_3216" 202.704,102.599 r0 bottom
C49 "220 pF" "CAP 0603_1608" 203.339,105.901 r0 bottom
C50 "0.1 µF" "CAP 0402_1005" 182.338,100.235 r0 bottom
C51 "10 µF" "CAP 0805_2012" 182.647,98.66 r0 bottom
C52 "9 pF" "CAP 0805_2012" 174.57,98.406 r180 bottom
C53 "0.1µF" "CAP 0603_1608" 139.246,79.424 r90 top
C54 "0.1µF" "CAP 0603_1608" 153.47,78.575 r90 top
C55 "0.1 µF" "CAP 0402_1005" 100.768,104.745 r0 top
C56 "0.1 µF" "CAP 0402_1005" 83.056,116.683 r180 top
C57 "0.1 µF" "CAP 0402_1005" 82.548,113.635 r180 top
C58 "0.1 µF" "CAP 0402_1005" 82.548,112.111 r180 top
C59 "0.1 µF" "CAP 0402_1005" 82.548,107.285 r180 top
C60 "0.1 µF" "CAP 0402_1005" 82.548,103.221 r180 top
C61 "0.1 µF" "CAP 0402_1005" 83.07,92.821 r180 top
C62 "0.1 µF" "CAP 0402_1005" 83.056,137.511 r180 top
C63 "0.1 µF" "CAP 0402_1005" 83.056,135.987 r180 top
C64 "0.1 µF" "CAP 0402_1005" 83.134,131.083 r180 top
C65 "0.1 µF" "CAP 0402_1005" 83.056,127.351 r180 top
C66 "0.1 µF" "CAP 0402_1005" 100.954,133.447 r0 top
C67 "0.1 µF" "CAP 0402_1005" 100.923,128.652 r0 top
C68 "0.1 µF" "CAP 0402_1005" 100.7,109.571 r0 top
C69 "0.1 µF" "CAP 0603_1608" 80.097,76.962 r0 top
C70 "10 µF" "CAP 0805_2012" 79.94,106.053 r270 top
C71 "1 µF" "CAP 0805_2012" 70.796,112.327 r90 top
C72 "4.7µF" "CAP POL 1411_3528" 153.42,149.2 r0 top
C73 "10 µF" "CAP 0805_2012" 149.26,149.3 r270 top
C74 "4.7µF" "CAP POL 1411_3528" 159,142.5 r0 top
C75 "4.7µF" "CAP POL 1411_3528" 189.44,139.9 r180 top
C76 "10 µF" "CAP 0805_2012" 193.6,139.8 r90 top
C77 "4.7µF" "CAP POL 1411_3528" 183.76,146.6 r180 top
C78 "4.7µF" "CAP POL 1411_3528" 166.186,140.046 r180 top
C79 "10 µF" "CAP 0805_2012" 170.3,139.9 r90 top
C80 "4.7µF" "CAP POL 1411_3528" 160.46,146.7 r180 top
C81 "22 pF" "CAP 0603_1608" 205.25,40.102 r270 bottom
C82 "10 µF" "CAP POL 1206_3216" 206.7,32.99 r90 bottom
C83 "47 µF" "CAP POL 2917_7343" 200.575,32.627 r180 bottom
C84 "10000 pF" "CAP 0603_1608" 208.45,41.602 r270 bottom
C85 "22 pF" "CAP 0603_1608" 195.65,38.802 r270 bottom
C86 "10 µF" "CAP POL 1206_3216" 189.2,41.01 r270 bottom
C87 "47 µF" "CAP POL 2917_7343" 200.725,27.227 r0 bottom
C88 "10000 pF" "CAP 0603_1608" 191.15,36.152 r90 bottom
C89 "0.1 µF" "CAP 0603_1608" 195.05,41.027 r180 bottom
C90 "0.1 µF" "CAP 0603_1608" 205.25,37.202 r270 bottom
C91 "4.7µF" "CAP POL 1411_3528" 177.02,149.3 r0 top
C92 "10 µF" "CAP 0805_2012" 172.86,149.4 r270 top
C93 "1 µF" "CAP 0805_2012" 199.9,134 r90 top
C94 "22 µF" "CAP 0805_2012" 201.9,134 r90 top
C95 "4.7µF" "CAP POL 1411_3528" 182.56,142.6 r0 top
C96_XLR1 "1 µF" "CAP 0805_2012" 226.2,26.6 r270 bottom (schematic designator C96)
C96_XLR2 "1 µF" "CAP 0805_2012" 226.1,58.7 r270 bottom (schematic designator C96)
C96_XLR3 "1 µF" "CAP 0805_2012" 226.2,90.7 r270 bottom (schematic designator C96)
C96_XLR4 "1 µF" "CAP 0805_2012" 226.2,122.7 r270 bottom (schematic designator C96)
D1_XLR1 "1N4148W-TP" SOD-123 222.996,31.216 r180 bottom (schematic designator D1)
D1_XLR2 "1N4148W-TP" SOD-123 223.028,63.216 r180 bottom (schematic designator D1)
D1_XLR3 "1N4148W-TP" SOD-123 222.996,95.216 r180 bottom (schematic designator D1)
D1_XLR4 "1N4148W-TP" SOD-123 222.996,127.216 r180 bottom (schematic designator D1)
D2_XLR1 "Red" "LED 0805_2012 RED" 227.822,29.565 r180 bottom (schematic designator D2)
D2_XLR2 "Red" "LED 0805_2012 RED" 227.854,61.565 r180 bottom (schematic designator D2)
D2_XLR3 "Red" "LED 0805_2012 RED" 227.822,93.565 r180 bottom (schematic designator D2)
D2_XLR4 "Red" "LED 0805_2012 RED" 227.822,125.565 r180 bottom (schematic designator D2)
D3 "SS24" "DO214AA SMB" 196.7,138.35 r270 top
D4_XLR1 "Green" "LED 0805_2012 GREEN" 224.099,26.6 r90 bottom (schematic designator D4)
D4_XLR2 "Green" "LED 0805_2012 GREEN" 224,58.7 r90 bottom (schematic designator D4)
D4_XLR3 "Green" "LED 0805_2012 GREEN" 224.1,90.8 r90 bottom (schematic designator D4)
D4_XLR4 "Green" "LED 0805_2012 GREEN" 224.2,122.75 r90 bottom (schematic designator D4)
IC1 "ams1117-3.3v" SOT-223 141.08,77.657 r90 bottom
IC1_XLR1 "NE5532DRE4" SOIC127P600X175-8N 227.187,39.344 r270 bottom (schematic designator IC1)
IC1_XLR2 "NE5532DRE4" SOIC127P600X175-8N 227.219,71.344 r270 bottom (schematic designator IC1)
IC1_XLR3 "NE5532DRE4" SOIC127P600X175-8N 227.187,103.344 r270 bottom (schematic designator IC1)
IC1_XLR4 "NE5532DRE4" SOIC127P600X175-8N 227.187,135.344 r270 bottom (schematic designator IC1)
IC2 "ISO7241CDWR" SOIC127P1030X265-16N 146.561,83.147 r0 top
IC2_XLR1 "NE5532DRE4" SOIC127P600X175-8N 219.821,39.344 r270 bottom (schematic designator IC2)
IC2_XLR2 "NE5532DRE4" SOIC127P600X175-8N 219.853,71.344 r270 bottom (schematic designator IC2)
IC2_XLR3 "NE5532DRE4" SOIC127P600X175-8N 219.821,103.344 r270 bottom (schematic designator IC2)
IC2_XLR4 "NE5532DRE4" SOIC127P600X175-8N 219.821,135.344 r270 bottom (schematic designator IC2)
IC3 "ISO7241CDWR" SOIC127P1030X265-16N 146.49,37.319 r0 top
IC4 "ISO7241CDWR" SOIC127P1030X265-16N 146.49,48.769 r0 top
IC5 "ISO7241CDWR" SOIC127P1030X265-16N 146.49,60.199 r0 top
IC6 "ISO7241CDWR" SOIC127P1030X265-16N 146.561,71.717 r0 top
IC7 "ams1117-3.3v" SOT-223 141.08,89.595 r90 bottom
IC8 "N25Q128A13ESE40F" SOIC127P790X216-8N 84.512,80.615 r180 top
IC9 "LD1117DT33TR" TO228P972X240-3N 75.362,109.793 r270 top
IC10 "B0505S-1W" B0505S-1W 159.84,139.2 r180 top
IC11 "B0505S-1W" B0505S-1W 183.02,149.9 r0 top
IC12 "B0505S-1W" B0505S-1W 159.72,150 r0 top
IC13 "NE5532DRE4" SOIC127P600X175-8N 200.55,38.627 r180 bottom
IC14 "B0505S-1W" B0505S-1W 183.44,139.3 r180 top
J1_XLR1 "35RASMT2BHNTRX" PJ_327 252.984,17.018 r180 bottom (schematic designator J1)
J1_XLR2 "35RASMT2BHNTRX" PJ_327 252.984,49.022 r180 bottom (schematic designator J1)
J1_XLR3 "35RASMT2BHNTRX" PJ_327 252.984,80.518 r180 bottom (schematic designator J1)
J1_XLR4 "35RASMT2BHNTRX" PJ_327 252.984,112.014 r180 bottom (schematic designator J1)
J2_XLR1 "35RASMT2BHNTRX" PJ_327 252.984,27.432 r180 bottom (schematic designator J2)
J2_XLR2 "35RASMT2BHNTRX" PJ_327 252.984,59.436 r180 bottom (schematic designator J2)
J2_XLR3 "35RASMT2BHNTRX" PJ_327 252.984,90.932 r180 bottom (schematic designator J2)
J2_XLR4 "35RASMT2BHNTRX" PJ_327 252.984,122.936 r180 bottom (schematic designator J2)
J3 "35RASMT2BHNTRX" PJ_327 143.4,149.227 r270 bottom
J4 "" "CON: JUMPER x1" 154.59,62.472 r0 bottom
J5 "" "CON: JUMPER x1" 154.62,70.867 r0 bottom
J6 "" "CON: JUMPER x1" 154.59,72.479 r0 bottom
J7 "" "CON: JUMPER x1" 154.59,69.304 r0 bottom
J8 "" "CON: JUMPER x1" 154.528,74.079 r0 bottom
J9 "" "CON: JUMPER x1" 154.59,34.862 r0 bottom
J10 "" "CON: JUMPER x1" 154.604,36.381 r0 bottom
J11 "" "CON: JUMPER x1" 154.59,37.986 r0 bottom
J12 "" "CON: JUMPER x1" 154.59,39.586 r0 bottom
J13 "" "CON: JUMPER x1" 154.642,48.525 r0 bottom
J14 "" "CON: JUMPER x1" 154.642,46.341 r0 bottom
J15 "" "CON: JUMPER x1" 154.652,50.127 r0 bottom
J16 "" "CON: JUMPER x1" 154.623,57.786 r0 bottom
J17 "" "CON: JUMPER x1" 154.623,60.91 r0 bottom
J18 "" "CON: JUMPER x1" 154.623,52.35 r0 bottom
J19 "" "CON: JUMPER x1" 154.606,59.402 r0 bottom
J20 "" "CON: JUMPER x1" 154.525,85.992 r0 bottom
J21 "" "CON: JUMPER x1" 154.525,82.893 r0 bottom
J22 "" "CON: JUMPER x1" 154.525,80.734 r0 bottom
J23 "" "CON: JUMPER x1" 154.496,84.456 r0 bottom
J24 "" "CON: JUMPER x2"#1 174.1,96.024 r270 bottom
J25 "20021121-00008T4LF" 2002112100008T4LF 175.624,30.162 r180 bottom
J26 "20021121-00008T4LF" 2002112100008T4LF 168.385,30.162 r180 bottom
J27 "20021121-00008T4LF" 2002112100008T4LF 161.146,30.162 r180 bottom
J28 "" "CON: JUMPER x2"#2 176.132,58.432 r270 bottom
J29 "35RASMT2BHNTRX" PJ_327 183.554,18.864 r90 bottom
J30 "35RASMT2BHNTRX" PJ_327 169.454,18.864 r90 bottom
J31 "35RASMT2BHNTRX" PJ_327 155.154,18.864 r90 bottom
J32 "35RASMT2BHNTRX" PJ_327 200.45,18.9 r90 bottom
J33 "" "CON: JUMPER x1" 178.497,105.537 r0 top
J34 "" "CON: JUMPER x1" 178.435,85.09 r0 top
J35 "" "CON: JUMPER x1" 178.435,65.151 r0 top
J36 "" "CON: JUMPER x1" 211.328,83.566 r0 top
J37 "" "CON: JUMPER x1" 93.98,147.258 r270 top
J38 "TYPE-C-31-M-12" "HRO_TYPE-C-31-M-12 - REZONIT" 93.98,154.305 r180 top
J39 "35RASMT2BHNTRX" PJ_327 155.154,18.864 r90 top
J40 "35RASMT2BHNTRX" PJ_327 169.454,18.864 r90 top
J41 "35RASMT2BHNTRX" PJ_327 183.554,18.864 r90 top
J42 "" "CON: JUMPER x1" 75.438,115.824 r270 top
J43_XLR1 "NCJ6FA-H" ACJC10HL 249.951,38.926 r270 top (schematic designator J43)
J43_XLR2 "NCJ6FA-H" ACJC10HL 249.951,70.93 r270 top (schematic designator J43)
J43_XLR3 "NCJ6FA-H" ACJC10HL 249.951,102.426 r270 top (schematic designator J43)
J43_XLR4 "NCJ6FA-H" ACJC10HL 249.936,134.874 r270 top (schematic designator J43)
J44 "" "CON: JUMPER x1" 134.3,148.1 r0 top
J45 "35RASMT2BHNTRX" PJ_327 200.45,18.9 r90 top
L1 "33 µH" "BOURNS SRR1280" 202.5,148.6 r180 top
L2 "10uH" IND_CD54 151.36,143.805 r270 top
L3 "10uH" IND_CD54 132.595,152.1 r180 top
L4 "10uH" IND_CD54 191.5,145.295 r90 top
L5 "10uH" IND_CD54 174.96,143.905 r270 top
L6 "10uH" IND_CD54 168.2,145.395 r90 top
MH5_XLR4 "MountingHole" Hole_2.5mm 249.886,152.11 r270 top (schematic designator MH5)
MH10 "MountingHole" Hole_2.5mm 43.09,30.183 r90 top
MH11 "MountingHole" Hole_2.5mm 43.09,62.183 r90 top
MH12 "MountingHole" Hole_2.5mm 43.09,94.183 r90 top
MH13 "MountingHole" Hole_2.5mm 43.09,126.183 r90 top
PS1 "XL6007E1" SOIC127P600X175-8N 202.6,138.6 r180 top
Q1 "MMBT3904-7-F" "DIODES SOT-23-3" 72.898,132.588 r0 top
Q2 "MMBT3904-7-F" "DIODES SOT-23-3" 72.66,125.156 r180 top
Q3_XLR1 "MMBT3904-7-F" "DIODES SOT-23-3" 228.9,26.5 r90 bottom (schematic designator Q3)
Q3_XLR2 "MMBT3904-7-F" "DIODES SOT-23-3" 228.9,58.7 r90 bottom (schematic designator Q3)
Q3_XLR3 "MMBT3904-7-F" "DIODES SOT-23-3" 228.9,90.6 r90 bottom (schematic designator Q3)
Q3_XLR4 "MMBT3904-7-F" "DIODES SOT-23-3" 228.9,122.6 r90 bottom (schematic designator Q3)
R1 "5.6 kOhms" "RES 0603_1608" 203.902,69.264 r180 bottom
R1_1 "510 Ohms" "YAGEO RES 0603_1608" 48.69,147.812 r0 top
R1_XLR1 "510 Ohms" "RES 0603_1608" 225.116,43.789 r0 bottom (schematic designator R1)
R1_XLR2 "510 Ohms" "RES 0603_1608" 225.148,75.789 r0 bottom (schematic designator R1)
R1_XLR3 "510 Ohms" "RES 0603_1608" 225.116,107.789 r0 bottom (schematic designator R1)
R1_XLR4 "510 Ohms" "RES 0603_1608" 225.116,139.789 r0 bottom (schematic designator R1)
R2 "5.6 kOhms" "RES 0603_1608" 204.664,84.438 r180 bottom
R2_1 "510 Ohms" "YAGEO RES 0603_1608" 48.69,115.808 r0 top
R2_XLR1 "510 Ohms" "RES 0603_1608" 228.672,48.615 r180 bottom (schematic designator R2)
R2_XLR2 "510 Ohms" "RES 0603_1608" 228.704,80.615 r180 bottom (schematic designator R2)
R2_XLR3 "510 Ohms" "RES 0603_1608" 228.672,112.615 r180 bottom (schematic designator R2)
R2_XLR4 "510 Ohms" "RES 0603_1608" 228.672,144.615 r180 bottom (schematic designator R2)
R3 "5.6 kOhms" "RES 0603_1608" 202.475,65.708 r0 bottom
R3_1 "510 Ohms" "YAGEO RES 0603_1608" 48.69,83.804 r0 top
R3_XLR1 "5.1 kOhms" "RES 0603_1608" 220.964,44.893 r270 bottom (schematic designator R3)
R3_XLR2 "5.1 kOhms" "RES 0603_1608" 220.996,76.893 r270 bottom (schematic designator R3)
R3_XLR3 "5.1 kOhms" "RES 0603_1608" 220.964,108.893 r270 bottom (schematic designator R3)
R3_XLR4 "5.1 kOhms" "RES 0603_1608" 220.964,140.893 r270 bottom (schematic designator R3)
R4 "5.6 kOhms" "RES 0603_1608" 203.364,80.882 r0 bottom
R4_1 "510 Ohms" "YAGEO RES 0603_1608" 48.69,51.8 r0 top
R4_XLR1 "1 MOhms" "RES 0603_1608" 234.06,50.393 r0 bottom (schematic designator R4)
R4_XLR2 "1 MOhms" "RES 0603_1608" 234.092,82.393 r0 bottom (schematic designator R4)
R4_XLR3 "1 MOhms" "RES 0603_1608" 234.06,114.393 r0 bottom (schematic designator R4)
R4_XLR4 "1 MOhms" "RES 0603_1608" 234.06,146.393 r0 bottom (schematic designator R4)
R5 "5.6 kOhms" "RES 0603_1608" 203.932,70.788 r180 bottom
R5_XLR1 "150 kOhms" "RES 0603_1608" 226.894,33.121 r180 bottom (schematic designator R5)
R5_XLR2 "150 kOhms" "RES 0603_1608" 226.926,65.121 r180 bottom (schematic designator R5)
R5_XLR3 "150 kOhms" "RES 0603_1608" 226.894,97.121 r180 bottom (schematic designator R5)
R5_XLR4 "150 kOhms" "RES 0603_1608" 226.894,129.121 r180 bottom (schematic designator R5)
R6 "5.6 kOhms" "RES 0603_1608" 204.664,86.089 r180 bottom
R6_XLR1 "5.1 kOhms" "RES 0603_1608" 218.551,43.916 r180 bottom (schematic designator R6)
R6_XLR2 "5.1 kOhms" "RES 0603_1608" 218.583,75.916 r180 bottom (schematic designator R6)
R6_XLR3 "5.1 kOhms" "RES 0603_1608" 218.551,107.916 r180 bottom (schematic designator R6)
R6_XLR4 "5.1 kOhms" "RES 0603_1608" 218.551,139.916 r180 bottom (schematic designator R6)
R7 "5.6 kOhms" "RES 0603_1608" 202.602,74.471 r0 bottom
R7_XLR1 "510 Ohms" "RES 0603_1608" 225.194,48.615 r0 bottom (schematic designator R7)
R7_XLR2 "510 Ohms" "RES 0603_1608" 225.226,80.615 r0 bottom (schematic designator R7)
R7_XLR3 "510 Ohms" "RES 0603_1608" 225.194,112.615 r0 bottom (schematic designator R7)
R7_XLR4 "510 Ohms" "RES 0603_1608" 225.194,144.615 r0 bottom (schematic designator R7)
R8 "5.6 kOhms" "RES 0603_1608" 203.364,89.772 r0 bottom
R8_XLR1 "51 kOhms" "RES 0603_1608" 225.116,45.313 r0 bottom (schematic designator R8)
R8_XLR2 "51 kOhms" "RES 0603_1608" 225.148,77.313 r0 bottom (schematic designator R8)
R8_XLR3 "51 kOhms" "RES 0603_1608" 225.116,109.313 r0 bottom (schematic designator R8)
R8_XLR4 "51 kOhms" "RES 0603_1608" 225.116,141.313 r0 bottom (schematic designator R8)
R9_XLR1 "510 Ohms" "RES 0603_1608" 229.346,32.271 r90 bottom (schematic designator R9)
R9_XLR2 "510 Ohms" "RES 0603_1608" 229.378,64.271 r90 bottom (schematic designator R9)
R9_XLR3 "510 Ohms" "RES 0603_1608" 229.346,96.271 r90 bottom (schematic designator R9)
R9_XLR4 "510 Ohms" "RES 0603_1608" 229.346,128.271 r90 bottom (schematic designator R9)
R10 "22 Ohms" "RES 0402_1005" 158.248,85.349 r0 top
R10_XLR1 "5.1 kOhms" "RES 0603_1608" 218.844,34.518 r0 bottom (schematic designator R10)
R10_XLR2 "5.1 kOhms" "RES 0603_1608" 218.876,66.518 r0 bottom (schematic designator R10)
R10_XLR3 "5.1 kOhms" "RES 0603_1608" 218.844,98.518 r0 bottom (schematic designator R10)
R10_XLR4 "5.1 kOhms" "RES 0603_1608" 218.844,130.518 r0 bottom (schematic designator R10)
R11 "CAY16-33R0F4LF" "RESNET 1206-8 CONVEX" 176.57,72.459 r270 bottom
R11_XLR1 "51 kOhms" "RES 0603_1608" 228.672,45.313 r180 bottom (schematic designator R11)
R11_XLR2 "51 kOhms" "RES 0603_1608" 228.704,77.313 r180 bottom (schematic designator R11)
R11_XLR3 "51 kOhms" "RES 0603_1608" 228.672,109.313 r180 bottom (schematic designator R11)
R11_XLR4 "51 kOhms" "RES 0603_1608" 228.672,141.313 r180 bottom (schematic designator R11)
R12 "CAY16-33R0F4LF" "RESNET 1206-8 CONVEX" 176.595,91.89 r90 bottom
R13_XLR1 "5.1 kOhms" "RES 0603_1608" 222.234,44.893 r270 bottom (schematic designator R13)
R13_XLR2 "5.1 kOhms" "RES 0603_1608" 222.266,76.893 r270 bottom (schematic designator R13)
R13_XLR3 "5.1 kOhms" "RES 0603_1608" 222.234,108.893 r270 bottom (schematic designator R13)
R13_XLR4 "5.1 kOhms" "RES 0603_1608" 222.234,140.893 r270 bottom (schematic designator R13)
R14 "22 Ohms" "RES 0402_1005" 158.248,84.194 r0 top
R14_XLR1 "5.1 kOhms" "RES 0603_1608" 218.668,53.142 r180 bottom (schematic designator R14)
R14_XLR2 "5.1 kOhms" "RES 0603_1608" 218.7,85.142 r180 bottom (schematic designator R14)
R14_XLR3 "5.1 kOhms" "RES 0603_1608" 218.668,117.142 r180 bottom (schematic designator R14)
R14_XLR4 "5.1 kOhms" "RES 0603_1608" 218.668,149.142 r180 bottom (schematic designator R14)
R15 "100 Ohms" "RES 0402_1005" 173.973,72.498 r90 bottom
R15_XLR1 "5.1 kOhms" "RES 0603_1608" 218.59,51.491 r180 bottom (schematic designator R15)
R15_XLR2 "5.1 kOhms" "RES 0603_1608" 218.622,83.491 r180 bottom (schematic designator R15)
R15_XLR3 "5.1 kOhms" "RES 0603_1608" 218.59,115.491 r180 bottom (schematic designator R15)
R15_XLR4 "5.1 kOhms" "RES 0603_1608" 218.59,147.491 r180 bottom (schematic designator R15)
R16 "100 Ohms" "RES 0402_1005" 173.998,91.929 r90 bottom
R16_XLR1 "510 Ohms" "RES 0603_1608" 218.59,49.84 r0 bottom (schematic designator R16)
R16_XLR2 "510 Ohms" "RES 0603_1608" 218.622,81.84 r0 bottom (schematic designator R16)
R16_XLR3 "510 Ohms" "RES 0603_1608" 218.59,113.84 r0 bottom (schematic designator R16)
R16_XLR4 "510 Ohms" "RES 0603_1608" 218.59,145.84 r0 bottom (schematic designator R16)
R17 "5.6 kOhms" "RES 0603_1608" 169.162,82.531 r180 bottom
R17_XLR1 "51 kOhms" "RES 0603_1608" 221.726,33.795 r90 bottom (schematic designator R17)
R17_XLR2 "51 kOhms" "RES 0603_1608" 221.758,65.795 r90 bottom (schematic designator R17)
R17_XLR3 "51 kOhms" "RES 0603_1608" 221.726,97.795 r90 bottom (schematic designator R17)
R17_XLR4 "51 kOhms" "RES 0603_1608" 221.726,129.795 r90 bottom (schematic designator R17)
R18 "5.6 kOhms" "RES 0603_1608" 169.162,81.007 r180 bottom
R18_XLR1 "510 Ohms" "RES 0603_1608" 218.932,29.565 r0 bottom (schematic designator R18)
R18_XLR2 "510 Ohms" "RES 0603_1608" 218.964,61.565 r0 bottom (schematic designator R18)
R18_XLR3 "510 Ohms" "RES 0603_1608" 218.932,93.565 r0 bottom (schematic designator R18)
R18_XLR4 "510 Ohms" "RES 0603_1608" 218.932,125.565 r0 bottom (schematic designator R18)
R19 "22 Ohms" "RES 0402_1005" 158.248,83.039 r0 top
R19_XLR1 "51 kOhms" "RES 0603_1608" 223.25,33.795 r270 bottom (schematic designator R19)
R19_XLR2 "51 kOhms" "RES 0603_1608" 223.282,65.795 r270 bottom (schematic designator R19)
R19_XLR3 "51 kOhms" "RES 0603_1608" 223.25,97.795 r270 bottom (schematic designator R19)
R19_XLR4 "51 kOhms" "RES 0603_1608" 223.25,129.795 r270 bottom (schematic designator R19)
R20 "22 Ohms" "RES 0402_1005" 158.248,81.049 r0 top
R20_XLR1 "5.1 kOhms" "RES 0603_1608" 218.844,33.121 r180 bottom (schematic designator R20)
R20_XLR2 "5.1 kOhms" "RES 0603_1608" 218.876,65.121 r180 bottom (schematic designator R20)
R20_XLR3 "5.1 kOhms" "RES 0603_1608" 218.844,97.121 r180 bottom (schematic designator R20)
R20_XLR4 "5.1 kOhms" "RES 0603_1608" 218.844,129.121 r180 bottom (schematic designator R20)
R21 "22 Ohms" "RES 0402_1005" 158.233,39.224 r0 top
R22 "22 Ohms" "RES 0402_1005" 158.233,37.869 r0 top
R23 "22 Ohms" "RES 0402_1005" 158.233,36.514 r0 top
R24 "22 Ohms" "RES 0402_1005" 158.233,35.059 r0 top
R25 "22 Ohms" "RES 0402_1005" 158.233,51.289 r0 top
R26 "22 Ohms" "RES 0402_1005" 158.233,49.834 r0 top
R27 "22 Ohms" "RES 0402_1005" 158.233,48.479 r0 top
R28 "22 Ohms" "RES 0402_1005" 158.233,47.024 r0 top
R29 "22 Ohms" "RES 0402_1005" 158.233,62.084 r0 top
R30 "22 Ohms" "RES 0402_1005" 158.233,60.814 r0 top
R31 "22 Ohms" "RES 0402_1005" 158.233,59.544 r0 top
R32 "22 Ohms" "RES 0402_1005" 158.233,58.274 r0 top
R33 "22 Ohms" "RES 0402_1005" 158.362,73.74 r0 top
R34 "22 Ohms" "RES 0402_1005" 158.362,72.385 r0 top
R35 "22 Ohms" "RES 0402_1005" 158.362,70.93 r0 top
R36 "22 Ohms" "RES 0402_1005" 158.362,69.575 r0 top
R37 "5.6 kOhms" "RES 0603_1608" 204.664,99.17 r180 bottom
R38 "5.6 kOhms" "RES 0603_1608" 203.364,95.614 r0 bottom
R39 "5.6 kOhms" "RES 0603_1608" 204.634,100.694 r180 bottom
R40 "5.6 kOhms" "RES 0603_1608" 203.364,104.377 r0 bottom
R41 "CAY16-33R0F4LF" "RESNET 1206-8 CONVEX" 176.57,112.591 r90 bottom
R42 "5.6 kOhms" "RES 0603_1608" 169.162,84.055 r180 bottom
R43 "10 kOhms" "RES 0603_1608" 80.56,126.335 r0 top
R44 "10 kOhms" "RES 0603_1608" 109.546,124.049 r180 top
R45 "36 kOhms" "RES 0603_1608" 207.2,137.15 r270 top
R46 "1 kOhms" "RES 0603_1608" 178.76,145.95 r270 top
R47 "1 kOhms" "RES 0603_1608" 207.2,139.95 r270 top
R48 "6.81 kOhms" "RES 0603_1608" 206.1,42.427 r180 bottom
R49 "1.47 kOhms" "RES 0603_1608" 208.45,38.827 r90 bottom
R50 "221 Ohms" "RES 0603_1608" 206.85,40.177 r270 bottom
R51 "1 kOhms" "RES 0603_1608" 205.35,44.577 r90 bottom
R52 "51 kOhms" "RES 0603_1608" 208.45,36.077 r270 bottom
R53 "191 Ohms" "RES 0603_1608" 206.95,44.577 r90 bottom
R54 "6.81 kOhms" "RES 0603_1608" 193.32,37.827 r0 bottom
R55 "1.47 kOhms" "RES 0603_1608" 191.15,38.977 r270 bottom
R56 "221 Ohms" "RES 0603_1608" 193.32,36.327 r0 bottom
R57 "1 kOhms" "RES 0603_1608" 193.32,39.427 r180 bottom
R58 "51 kOhms" "RES 0603_1608" 191.15,41.677 r90 bottom
R59 "191 Ohms" "RES 0603_1608" 192.75,41.477 r270 bottom
R60 "1 kOhms" "RES 0603_1608" 155.785,145.2 r180 top
R61 "1 kOhms" "RES 0603_1608" 187.05,143.9 r0 top
R62 "1 kOhms" "RES 0603_1608" 163.75,144 r0 top
R63_XLR1 "510 Ohms" "RES 0603_1608" 220.8,26.65 r90 bottom (schematic designator R63)
R63_XLR2 "510 Ohms" "RES 0603_1608" 220.8,58.85 r90 bottom (schematic designator R63)
R63_XLR3 "510 Ohms" "RES 0603_1608" 220.8,90.75 r90 bottom (schematic designator R63)
R63_XLR4 "510 Ohms" "RES 0603_1608" 220.8,122.75 r90 bottom (schematic designator R63)
R64_XLR1 "5.1 kOhms" "RES 0603_1608" 222.4,26.7 r270 bottom (schematic designator R64)
R64_XLR2 "5.1 kOhms" "RES 0603_1608" 222.4,58.9 r270 bottom (schematic designator R64)
R64_XLR3 "5.1 kOhms" "RES 0603_1608" 222.4,90.8 r270 bottom (schematic designator R64)
R64_XLR4 "5.1 kOhms" "RES 0603_1608" 222.4,122.8 r270 bottom (schematic designator R64)
R65_XLR1 "5.1 kOhms" "RES 0603_1608" 231.3,26.65 r90 bottom (schematic designator R65)
R65_XLR2 "5.1 kOhms" "RES 0603_1608" 231.3,58.55 r90 bottom (schematic designator R65)
R65_XLR3 "5.1 kOhms" "RES 0603_1608" 231.3,90.45 r90 bottom (schematic designator R65)
R65_XLR4 "5.1 kOhms" "RES 0603_1608" 231.3,122.45 r90 bottom (schematic designator R65)
R66_XLR1 "510 Ohms" "RES 0603_1608" 232.9,26.35 r270 bottom (schematic designator R66)
R66_XLR2 "510 Ohms" "RES 0603_1608" 232.9,58.55 r270 bottom (schematic designator R66)
R66_XLR3 "510 Ohms" "RES 0603_1608" 232.9,90.45 r270 bottom (schematic designator R66)
R66_XLR4 "510 Ohms" "RES 0603_1608" 232.9,122.45 r270 bottom (schematic designator R66)
R106 "10 kOhms" "RES 0603_1608" 72.644,135.382 r180 top
R107 "10 kOhms" "RES 0603_1608" 72.898,122.428 r0 top
R109 "10 kOhms" "RES 0603_1608" 72.786,129.794 r0 top
SW1 "PushSwitch_DPDT" TK-6580A-1 43.4,154.554 r270 top
SW2 "PushSwitch_DPDT" TK-6580A-1 43.4,122.554 r270 top
SW3 "PushSwitch_DPDT" TK-6580A-1 43.4,90.554 r270 top
SW4 "PushSwitch_DPDT" TK-6580A-1 43.4,58.554 r270 top
SW5 "SlideSwitch_DPDT" SK-22F03-G060 40.6,137.704 r270 top
SW6 "SlideSwitch_DPDT" SK-22F03-G060 40.6,105.704 r270 top
SW7 "SlideSwitch_DPDT" SK-22F03-G060 40.6,73.704 r270 top
SW8 "SlideSwitch_DPDT" SK-22F03-G060 40.6,41.704 r270 top
SW9 "PushSwitch_DPDT" TK-6580A-1 42.1,27.004 r270 top
TP1 "CLKOUT1" TESTPOINT 177.275,77.959 r0 bottom
U1 "WM8731" TSSOP-28 178.291,65.513 r270 bottom
U2 "WM8731" TSSOP-28 178.316,84.944 r270 bottom
U3 "WM8731" TSSOP-28 178.291,105.645 r270 bottom
U4 "W9812G6KH-6" TSOP-54 91.751,103.221 r270 top
U5 "W9812G6KH-6" TSOP-54 91.87,127.083 r270 top
U6 "SN74LVC1G08DBVR" SOT95P280X145-5N 128.016,142.24 r0 top
U7 "SN74LVC1G08DBVR" SOT95P280X145-5N 128.016,146.304 r0 top
X1 "Connector, 20pin, 2.54mm, 500VAC, 3A" "CON: PBD-20" 126.62,137.336 r270 top
X1_1 "Connector, 8pin, 2.54mm, 500VAC, 3A" "CON: PBD-8" 48.516,127.5 r90 top
X1_XLR1 "Connector, 8pin, 2.54mm, 500VAC, 3A" "CON: PLD-8" 244.459,54.793 r270 bottom (schematic designator X1)
X1_XLR2 "Connector, 8pin, 2.54mm, 500VAC, 3A" "CON: PLD-8" 244.491,86.793 r270 bottom (schematic designator X1)
X1_XLR3 "Connector, 8pin, 2.54mm, 500VAC, 3A" "CON: PLD-8" 244.586,118.916 r270 bottom (schematic designator X1)
X1_XLR4 "Connector, 8pin, 2.54mm, 500VAC, 3A" "CON: PLD-8" 244.459,150.793 r270 bottom (schematic designator X1)
X2 "Connector, 20pin, 2.54mm, 500VAC, 3A" "CON: PBD-20" 65.66,137.361 r270 top
X2_1 "Connector, 8pin, 2.54mm, 500VAC, 3A" "CON: PBD-8" 48.516,95.5 r90 top
X3 "Connector, 20pin, 2.54mm, 500VAC, 3A" "CON: PBD-20" 126.62,111.936 r270 top
X3_1 "Connector, 8pin, 2.54mm, 500VAC, 3A" "CON: PBD-8" 48.516,63.5 r90 top
X4 "Connector, 20pin, 2.54mm, 500VAC, 3A" "CON: PBD-20" 65.66,111.961 r270 top
X4_1 "Connector, 8pin, 2.54mm, 500VAC, 3A" "CON: PBD-8" 48.516,31.5 r90 top
X5 "Connector, 20pin, 2.54mm, 500VAC, 3A" "CON: PBD-20" 65.66,86.561 r270 top
X6 "Connector, 20pin, 2.54mm, 500VAC, 3A" "CON: PBD-20" 126.62,86.536 r270 top
X7 "Connector, 20pin, 2.54mm, 500VAC, 3A" "CON: PBD-20" 65.66,61.161 r270 top
X8 "Connector, 20pin, 2.54mm, 500VAC, 3A" "CON: PBD-20" 126.62,61.136 r270 top
X9 "Connector, 2pin, 2.54mm, 500VAC, 3A" "CON: PLS-2" 58.42,140.97 r0 top
X10 "Connector, 8pin, 2.54mm, 500VAC, 3A" "CON: PLD-8" 58.42,149.86 r270 top
X11 "Connector, 2pin, 2.54mm, 500VAC, 3A" "CON: PLS-2" 58.42,123.19 r0 top
X12 "Connector, 2pin, 2.54mm, 500VAC, 3A" "CON: PLS-2" 58.42,105.41 r0 top
X13 "Connector, 8pin, 2.54mm, 500VAC, 3A" "CON: PLD-8" 58.42,132.08 r270 top
X14 "Connector, 8pin, 2.54mm, 500VAC, 3A" "CON: PLD-8" 58.42,114.3 r270 top
X15 "Connector, 2pin, 2.54mm, 500VAC, 3A" "CON: PLS-2" 66.802,153.797 r180 top
Y1 "24.576MHz" "ABRACON ABM8G" 171.267,56.539 r90 bottom

## Footprints (in the part's own frame and the unit in brackets; to place one, negate y for a bottom-side part, rotate by r counter-clockwise, add the part's x,y. Pads: shape width x height; smd on the part's side, far side on the other; paste and mask are expansions set on the pad)
2002112100008T4LF [mm]
  rect 0.76x2.4 smd: 1(-1.905,-1.95) 2(-1.905,1.95) 3(-0.635,-1.95) 4(-0.635,1.95) 5(0.635,-1.95) 6(0.635,1.95) 7(1.905,-1.95) 8(1.905,1.95)
  silkscreen extent -2.54,-3.7 2.54,0.4, body extent -2.53,-2.75 2.55,2.75, height 4.5
"ABRACON ABM8G" [mm] "Crystal, 4-Leads, Body 2.50x3.20mm, Pitch 2.20mm, IPC Medium Density"
  rect 1.4x1.2 smd: 1(-1.1,-0.85) 2(1.1,-0.85) 3(1.1,0.85) 4(-1.1,0.85)
  silkscreen extent -2.25,-1.85 2.1,1.7, body extent -1.61,-1.26 1.61,1.26, height 0.6
ACJC10HL [mm] "https://www.digikey.nl/en/products/detail/amphenol-sine-systems-corp/ACJC10HL-BULK/13577736?s=N4IgTCBcDaIIIGEBSCCMAGAEgGRAXQF8g"
  round 2 hole 1.2 paste-2539.97 mask+0.051: 1(-6.1,-8.875) 2(6.1,-8.875) 3(0,-8.875) 4(5.2,-1.575) 5(-5.2,-4.975) 6(9.2,-15.475) G(0,-1.575) GS(-1.1,-5.225) RS(-3,-15.475) SS(3,-4.975) TS(3,-15.475)
  round 2.1 hole 1.8 unplated paste-2539.97: ""(-4,2.525)
  silkscreen extent -12.53,-14.61 12.47,15.23, body extent -13.6,-15.85 13.39,16.75, height 29.34
B0505S-1W [mil] "DC-DC module"
  rect 60x60 hole 30: 1(0,0)
  round 60 hole 30: 2(100,0) 3(200,0) 4(300,0)
  silkscreen extent -80,-50 380,195, body extent -80,-50 380,195, height 402
"BOURNS SRR1280" [mm] "Precision Wire Wound Inductor, 2-Leads, Body 12.50x12.50mm, IPC Medium Density"
  rect 2.9x5.4 smd: 1(-4.85,0) 2(4.85,0)
  silkscreen extent -6.4,-6.4 6.4,6.4, body extent -6.25,-6.25 6.25,6.25, height 7.9
"CAP 0402_1005" [mm] "Chip Capacitor, 2-Leads, Body 1.02x0.51mm, IPC Medium Density"
  rect 0.6x0.64 smd: 1(-0.44,0) 2(0.44,0)
  silkscreen extent -1,-0.5 1,0.5, body extent -0.5,-0.26 0.5,0.26, height 0.52
"CAP 0603_1608" [mm] "Chip Capacitor, 2-Leads, Body 1.60x0.80mm, IPC Medium Density"
  rect 0.9x1 smd: 1(-0.675,0) 2(0.675,0)
  silkscreen extent -1.4,-0.7 1.4,0.7, body extent -0.8,-0.41 0.8,0.41, height 0.82
"CAP 0805_2012" [mm] "Chip Capacitor, 2-Leads, Body 2.00x1.20mm, IPC Medium Density"
  rect 1.3x1.4 smd: 1(-0.8,0) 2(0.8,0)
  silkscreen extent -1.7,-0.9 1.7,0.9, body extent -1,-0.64 1,0.64, height 1.26
"CAP POL 1206_3216" [mm] "Molded Capacitor, 2-Leads, Body 3.20x1.6mm, IPC Medium Density"
  rect 1.8x1.23 smd: 1(-1.31,0) 2(1.31,0)
  silkscreen extent -3.22,-0.9 2.5,1.32, body extent -1.72,-0.85 1.71,0.85, height 1.7
"CAP POL 1411_3528" [mm] "Molded Capacitor, 2-Leads, Body 3.50x2.80mm, IPC Medium Density"
  rect 1.8x2.23 smd: 1(-1.46,0) 2(1.46,0)
  silkscreen extent -3,-1.5 2.71,1.48, body extent -1.87,-1.45 1.86,1.45, height 2
"CAP POL 2917_7343" [mm] "Molded Capacitor, 2-Leads, Body 7.30x4.30mm, IPC Medium Density"
  rect 2.55x2.45 smd: 1(-3.025,0) 2(3.025,0)
  silkscreen extent -4.58,-2.3 3.8,2.3, body extent -3.65,-2.15 3.65,2.15, height 4.1
"CON: JUMPER x1" [mm]
  rect 0.5x1 smd: 1(0,0) 2(0.7,0)
  silkscreen extent -0.45,-0.7 1.15,0.7
"CON: JUMPER x2"#1 [mm]
  rect 0.5x1 smd: 1(-0.35,1.4) 2(0.35,1.4) 3(-0.35,0) 4(0.35,0)
  silkscreen extent -0.8,-0.7 0.8,2.1
"CON: JUMPER x2"#2 [mm]
  rect 0.5x1 smd: 1(-0.35,-1.4) 2(0.35,-1.4) 3(-0.35,0) 4(0.35,0)
  silkscreen extent -0.8,-2.1 0.8,0.7
"CON: PBD-8" [mm] "PBD-8"
  oct 1.8x1.8 hole 1.1: 1(-3.81,-1.27)
  round 1.8 hole 1.1: 2(-3.81,1.27) 3(-1.27,-1.27) 4(-1.27,1.27) 5(1.27,-1.27) 6(1.27,1.27) 7(3.81,-1.27) 8(3.81,1.27)
  silkscreen extent -5.23,-2.68 5.23,2.68, body extent -5.08,-2.54 5.08,2.54, height 8.5
"CON: PBD-20" [mm]
  round 1.8 hole 1: 1(0,0) 2(0,2.54) 3(2.54,0) 4(2.54,2.54) 5(5.08,0) 6(5.08,2.54) 7(7.62,0) 8(7.62,2.54) 9(10.16,0) 10(10.16,2.54) 11(12.7,0) 12(12.7,2.54) 13(15.24,0) 14(15.24,2.54) 15(17.78,0) 16(17.78,2.54) 17(20.32,0) 18(20.32,2.54) 19(22.86,0) 20(22.86,2.54)
  round 0.5 on Top Overlay: ""(-1.775,-1.05)
  round 0.5 on Mech1: ""(-0.6,-0.7)
  silkscreen extent -1.3,-1.3 24.1,3.8, body extent -1.3,-1.3 24.1,3.78, height 8.4
"CON: PLD-8" [mm] "PLD-40 8 pin header"
  rect 2x2 hole 1.1: 1(-3.81,-1.27)
  round 2 hole 1.1: 2(-3.81,1.27) 3(-1.27,-1.27) 4(-1.27,1.27) 5(1.27,-1.27) 6(1.27,1.27) 7(3.81,-1.27) 8(3.81,1.27)
  silkscreen extent -5.08,-2.54 5.08,2.54, body extent -5.13,-2.55 5.03,2.53, height 8.54
"CON: PLS-2" [mm]
  rect 2x2 hole 1.1: 1(-1.27,0)
  round 2 hole 1.1: 2(1.27,0)
  silkscreen extent -2.54,-1.27 2.54,1.27, body extent -2.57,-1.28 2.51,1.26, height 8.54
"DIODES SOT-23-3" [mm] "SOT23, 3-Leads, Body 2.90x2.40mm, Pitch 0.95mm, IPC Medium Density"
  rect 0.9x0.8 smd: 1(-1,0.95) 2(-1,-0.95) 3(1,0)
  silkscreen extent -0.7,-1.45 0.7,1.45, body extent -1.41,-1.45 1.41,1.45, height 1.5
"DO214AA SMB" [mm] "Molded Diode, 2-Leads, Body 4.31x3.62mm, IPC Medium Density"
  rect 2.45x2.15 smd: 1(-2.15,0) 2(2.15,0)
  silkscreen extent -3.6,-1.8 3.8,1.8, body extent -2.6,-1.8 2.6,1.8, height 2.4
Hole_2.5mm [mm]
  round 2.5 hole 2: 0(0,0)
  body extent -0.5,-0.5 0.5,0.5, height 0.5
"HRO_TYPE-C-31-M-12 - REZONIT" [mm]
  rect 0.6x1.45 smd: A1B12(-3.25,5.095) A4B9(-2.45,5.095) B1A12(3.25,5.095) B4A9(2.45,5.095)
  rect 0.3x1.45 smd: A5(-1.25,5.095) A6(-0.25,5.095) A7(0.25,5.095) A8(1.25,5.095) B5(1.75,5.095) B6(0.75,5.095) B7(-0.75,5.095) B8(-1.75,5.095)
  oval 1.05x2.1 hole 0.6 slot 1.75 at 90 deg: S1(-4.32,4.18) S2(4.32,4.18)
  oval 1.05x2.1 hole 0.6 slot 1.5 at 90 deg: S3(-4.32,0) S4(4.32,0)
  round 0.7 hole 0.7 unplated: ""(-2.89,3.65) ""(2.89,3.65)
  silkscreen extent -4.47,-2.6 4.47,6.5, body extent -4.47,-2.6 4.47,5.31, height 3.31
IND_CD54 [mm]
  rect 2.5x5.5 smd: 1(-1.905,0) 2(1.905,0)
  silkscreen extent -2.92,-2.92 2.92,2.92
"LED 0805_2012 GREEN" [mm] "Chip Diode, 2-Leads, Body 2.00x1.25mm, IPC Medium Density"
  rect 1.2x1.2 smd: 1(-1.05,0) 2(1.05,0)
  silkscreen extent -2.03,-0.9 2.03,0.9, body extent -1,-0.63 1,0.63, height 0.9
"LED 0805_2012 RED" [mm] "Chip Diode, 2-Leads, Body 2.00x1.25mm, IPC Medium Density"
  rect 1.2x1.2 smd: 1(-1.05,0) 2(1.05,0)
  silkscreen extent -2.03,-0.9 2.03,0.9, body extent -1,-0.63 1,0.63, height 0.9
PJ_327 [mil]
  rect 60x100 smd mask+3: 2(98.43,-139.76) 3(-177.17,-139.76) 4(-208.66,139.76) 5(-66.93,139.76)
  rect 60x120 smd mask+3: 6(170,131.34)
  round 0 hole 51 unplated mask+3: 257(-168.22,0) 258(68,0)
  silkscreen extent -360,-118 199,118, body extent -364,-186 187,188, height 201
"RES 0402_1005" [mm] "Chip Resistor, 2-Leads, Body 1.0x0.5mm, IPC Medium Density"
  rect 0.75x0.6 smd: 1(-0.575,0) 2(0.575,0)
  silkscreen extent -1.14,-0.51 1.14,0.51, body extent -0.5,-0.25 0.5,0.25, height 0.35
"RES 0603_1608" [mm] "Chip Resistor, 2-Leads, Body 1.60x0.80mm, IPC Medium Density"
  rect 0.85x0.95 smd: 1(-0.65,0) 2(0.65,0)
  silkscreen extent -1.27,-0.7 1.27,0.7, body extent -0.8,-0.4 0.8,0.4, height 0.45
"RESNET 1206-8 CONVEX" [mm] "4 resistor 3.20x1.60mm, 0.7mm high"
  rect 0.9x0.45 smd: 1(-0.85,1.2) 2(-0.85,0.4) 3(-0.85,-0.4) 4(-0.85,-1.2) 5(0.85,-1.2) 6(0.85,-0.4) 7(0.85,0.4) 8(0.85,1.2)
  silkscreen extent -1.6,-1.73 1.6,1.73, body extent -0.84,-1.63 0.84,1.63, height 0.71
SK-22F03-G060 [mm] "G-Switch SK-22F03-G060"
  oval 1.8x1.2 hole 0.6 slot 1.3 at 0 deg paste-2539.97 mask+0.05: 1(-4,0) 2(0,0) 3(4,0) 4(4,2.6) 5(0,2.6) 6(-4,2.6)
  oval 1.3x2.8 hole 0.7 slot 2.2 at 90 deg paste-2539.97 mask+0.05: 7(-8.25,1.3) 8(8.25,1.3)
  silkscreen extent -8.5,-8.95 8.5,5.05, body extent -8.32,-9.59 8.38,5.01, height 9
SOD-123 [mm] "SOD, 2-Leads, Body 1.55x3.70mm, IPC Medium Density"
  rect 0.9x0.95 smd: 1(-1.575,0) 2(1.575,0)
  silkscreen extent -2.3,-0.92 2.41,0.92, body extent -1.86,-0.78 1.86,0.77, height 1.35
SOIC127P600X175-8N [mm]
  rect 1.525x0.65 smd: 1(-2.712,1.905) 2(-2.712,0.635) 3(-2.712,-0.635) 4(-2.712,-1.905) 5(2.712,-1.905) 6(2.712,-0.635) 7(2.712,0.635) 8(2.712,1.905)
  silkscreen extent -3.47,-2.45 1.6,2.58, body extent -3,-2.45 3,2.45, height 1.75
SOIC127P790X216-8N [mm]
  rect 1.65x0.65 smd: 1(-3.6,1.905) 2(-3.6,0.635) 3(-3.6,-0.635) 4(-3.6,-1.905) 5(3.6,-1.905) 6(3.6,-0.635) 7(3.6,0.635) 8(3.6,1.905)
  silkscreen extent -4.42,-2.64 2.42,2.64, body extent -3.95,-2.64 3.95,2.64, height 2.16
SOIC127P1030X265-16N [mm]
  rect 1.75x0.65 smd: 1(-4.775,4.445) 2(-4.775,3.175) 3(-4.775,1.905) 4(-4.775,0.635) 5(-4.775,-0.635) 6(-4.775,-1.905) 7(-4.775,-3.175) 8(-4.775,-4.445) 9(4.775,-4.445) 10(4.775,-3.175) 11(4.775,-1.905) 12(4.775,-0.635) 13(4.775,0.635) 14(4.775,1.905) 15(4.775,3.175) 16(4.775,4.445)
  silkscreen extent -5.65,-5.15 3.55,5.15, body extent -5.15,-5.15 5.15,5.15, height 2.65
SOT95P280X145-5N [mm]
  rrect50% 1.21x0.59 smd: 1(-1.255,0.95) 2(-1.255,0) 3(-1.255,-0.95) 4(1.255,-0.95) 5(1.255,0.95)
  silkscreen extent -2.51,-1.45 0.8,1.45, body extent -1.4,-1.45 1.4,1.45, height 1.45
SOT-223 [mm]
  rect 1.3x0.95 smd: 1(-3.35,2.29) 2(-3.35,0) 3(-3.35,-2.29)
  rect 1.3x3.25 smd: 4(3.35,0)
  silkscreen extent -4,-3.25 1.75,3.25, body extent -3.5,-3.25 3.5,3.25, height 1.8
TESTPOINT [mm]
  round 1 / inner round 0 / far side round 0 all layers, no hole mask+0.05: 1(0,0)
TK-6580A-1 [mil] "Pushbutton switch"
  round 60 hole 36 paste-99999 mask+2: 1(263.78,0) 2(263.78,78.74) 3(0,0) 4(0,78.74) 5(171.26,125.98) 6(92.52,125.98)
  silkscreen extent 18,-272 246,118, body extent 18,-291 254,261, height 317
TO228P972X240-3N [mm]
  rect 2.1x1 smd: 1(-4.35,2.28) 3(-4.35,-2.28)
  rect 5.85x4.9 smd: 4(2.45,0)
  silkscreen extent -5.27,-3.25 -0.85,3.43, body extent -4.97,-3.3 4.56,3.3, height 2.3